# EAGLE board SparkFun_LSM303C_6_DOF_IMU_Breakout_Panel_v10 (EAGLE 7.3.0), part 1 of 3
DESIGNER: Brent Wilkins; VERSION: v10
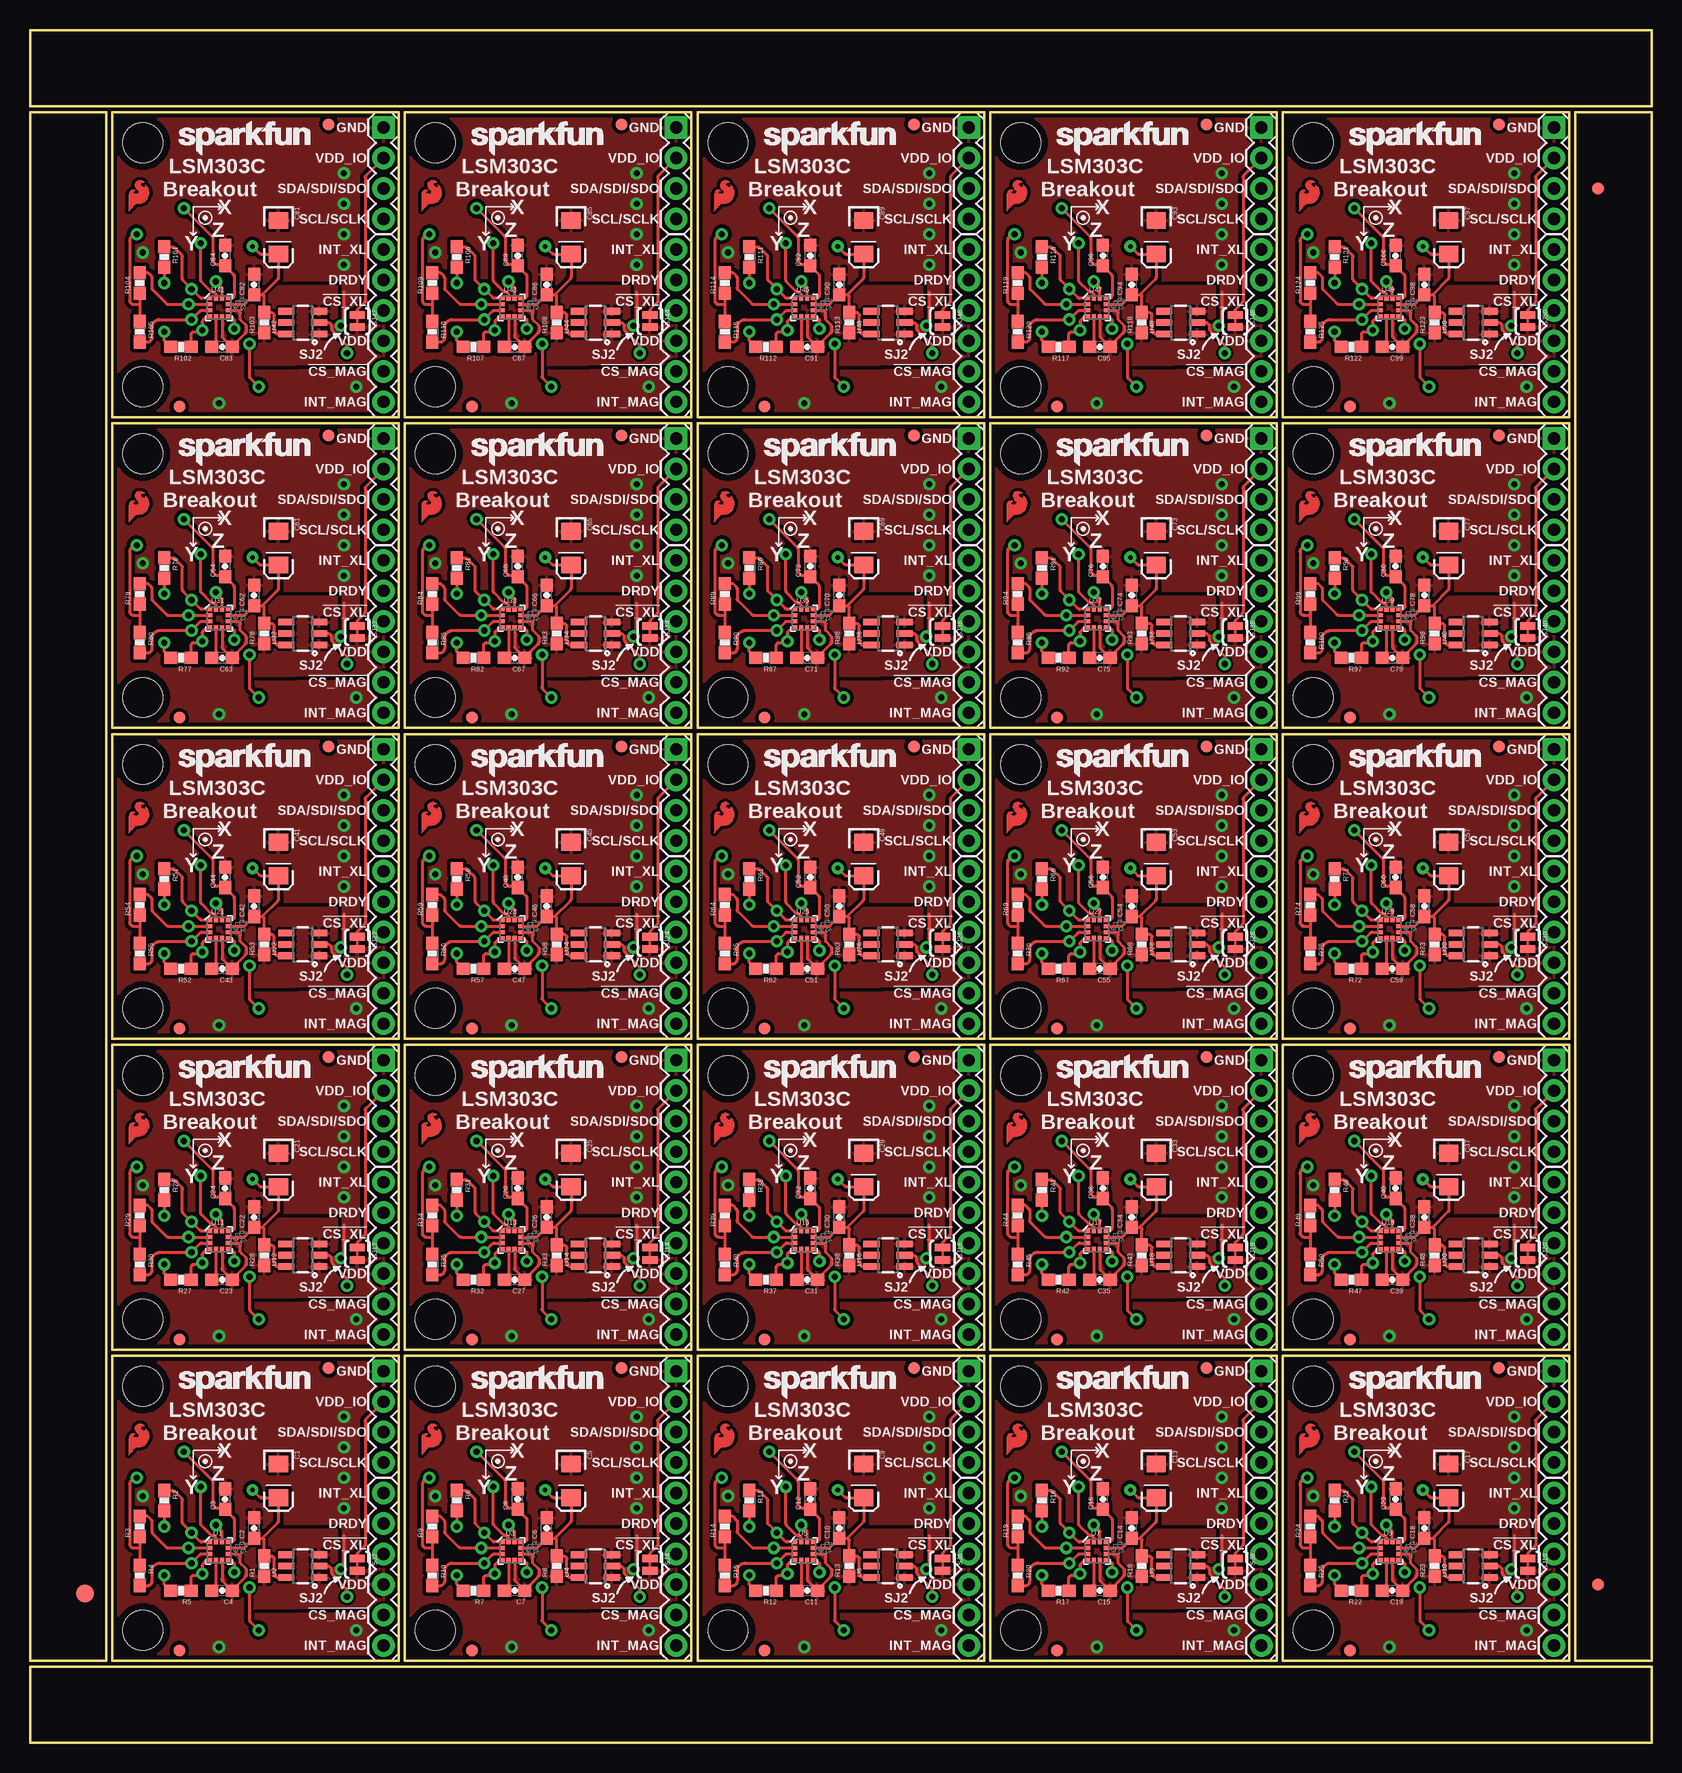
[diagram p0: board, top side]
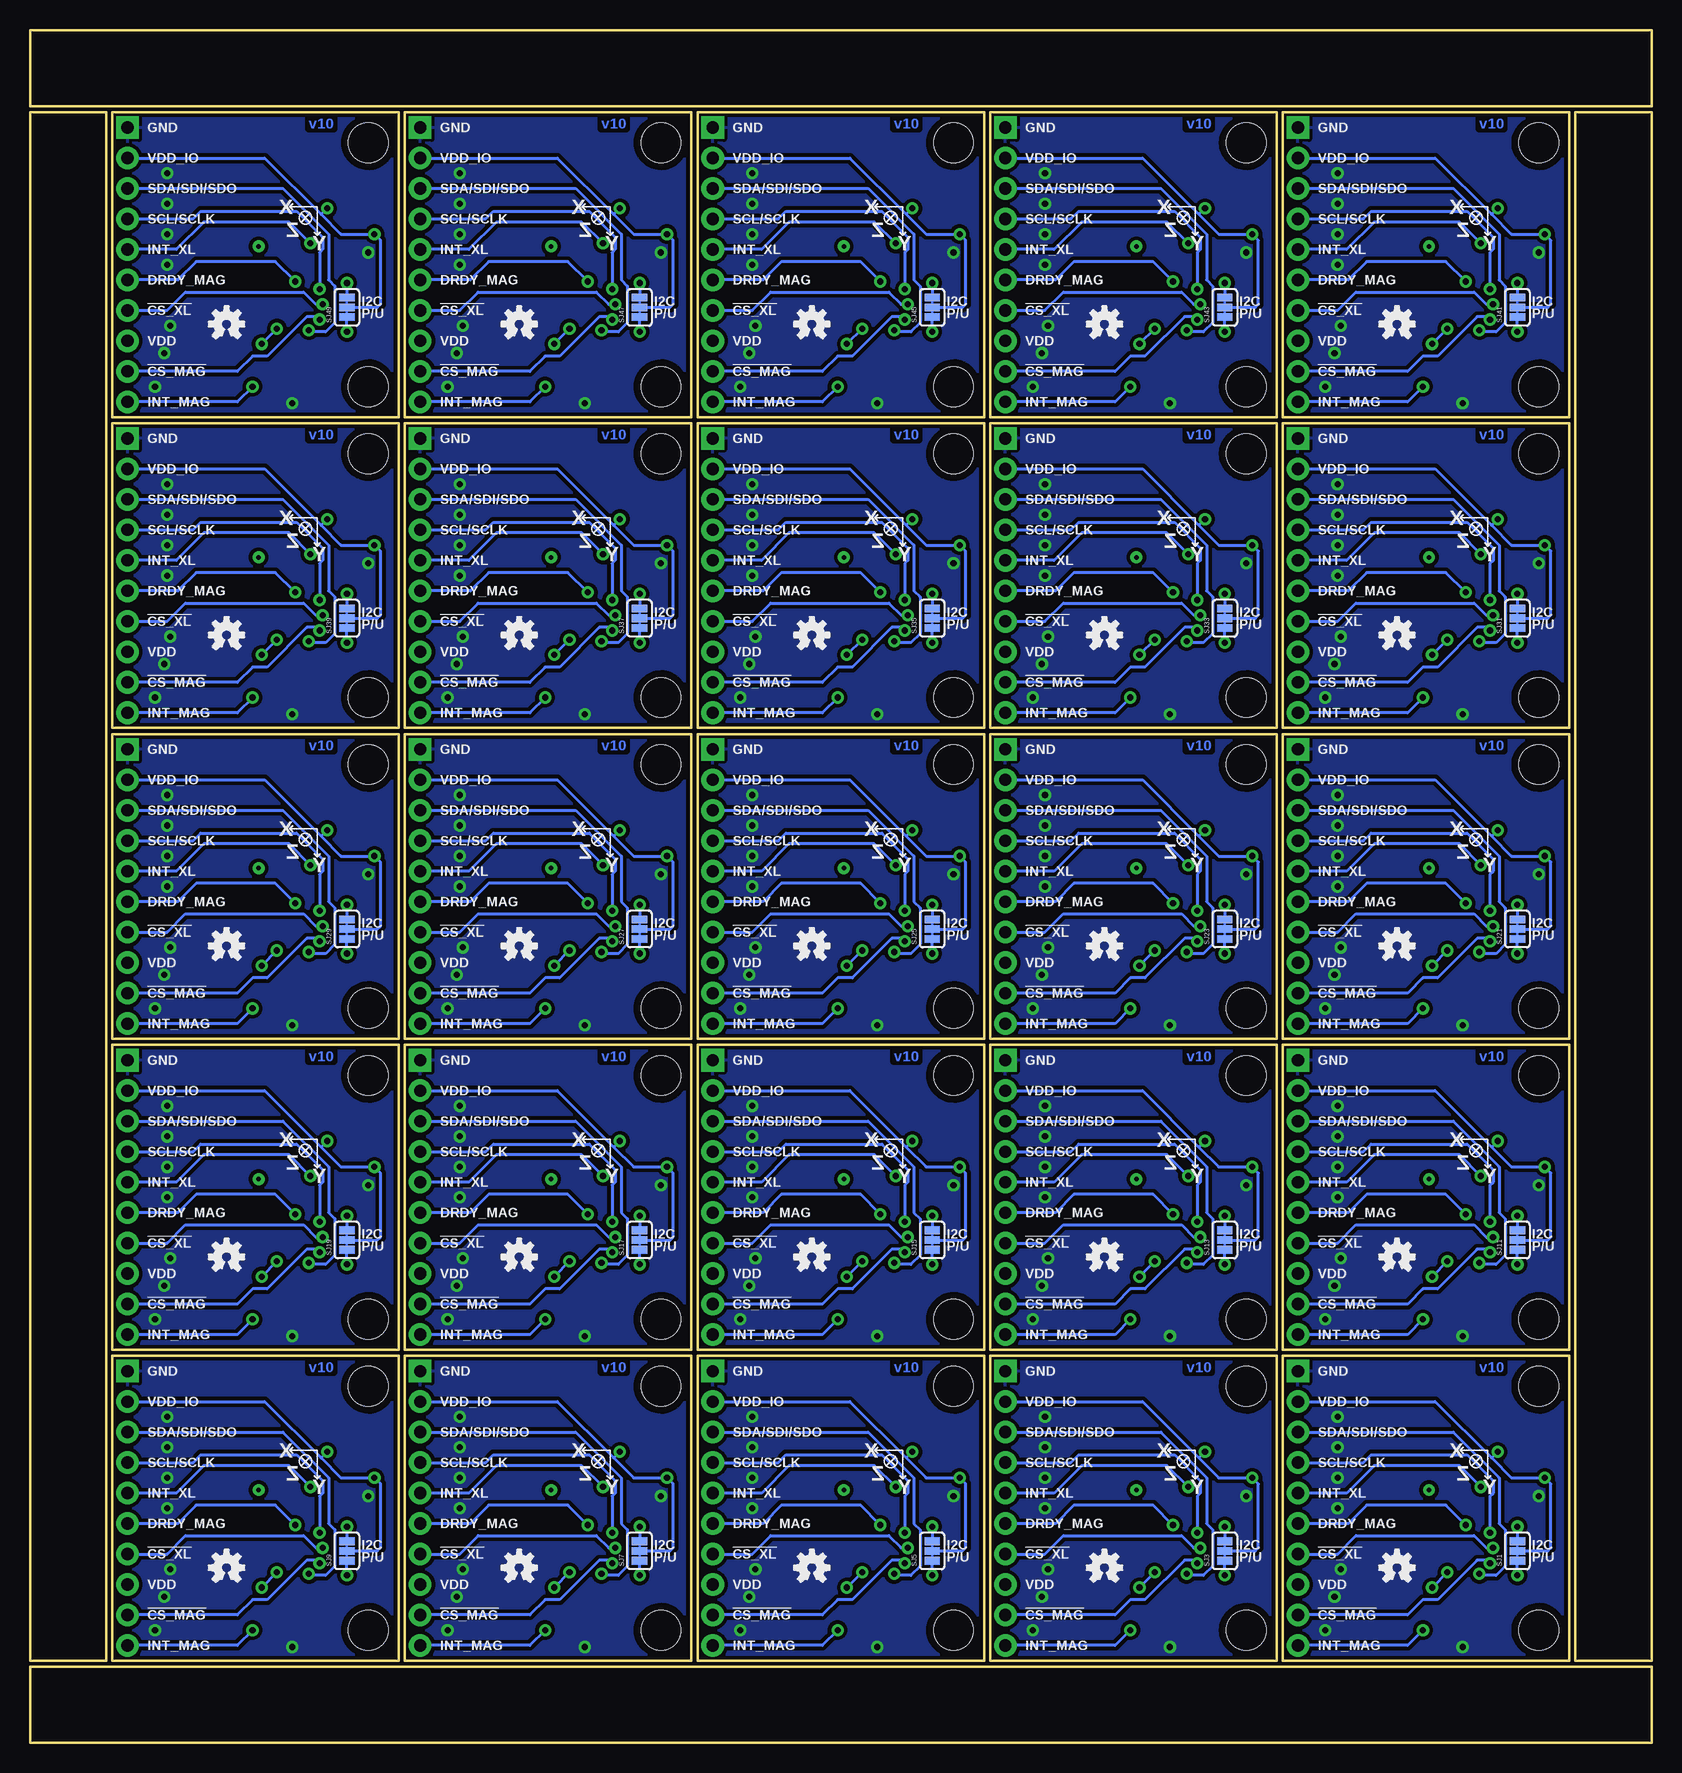
[diagram p1: board, bottom side, seen from below]

Size 135.13 x 142.75 mm. Coordinates in mm from the lower left corner, seen from the top.
Outline: 6.86,6.86 6.86,32.26 30.73,32.26 30.73,6.86 6.86,6.86
Outline: 31.24,6.86 31.24,32.26 55.12,32.26 55.12,6.86 31.24,6.86
Outline: 55.63,6.86 55.63,32.26 79.5,32.26 79.5,6.86 55.63,6.86
Outline: 80.01,6.86 80.01,32.26 103.89,32.26 103.89,6.86 80.01,6.86
Outline: 104.39,6.86 104.39,32.26 128.27,32.26 128.27,6.86 104.39,6.86
Outline: 6.86,32.77 6.86,58.17 30.73,58.17 30.73,32.77 6.86,32.77
Outline: 31.24,32.77 31.24,58.17 55.12,58.17 55.12,32.77 31.24,32.77
Outline: 55.63,32.77 55.63,58.17 79.5,58.17 79.5,32.77 55.63,32.77
Outline: 80.01,32.77 80.01,58.17 103.89,58.17 103.89,32.77 80.01,32.77
Outline: 104.39,32.77 104.39,58.17 128.27,58.17 128.27,32.77 104.39,32.77
Outline: 6.86,58.67 6.86,84.07 30.73,84.07 30.73,58.67 6.86,58.67
Outline: 31.24,58.67 31.24,84.07 55.12,84.07 55.12,58.67 31.24,58.67
Outline: 55.63,58.67 55.63,84.07 79.5,84.07 79.5,58.67 55.63,58.67
Outline: 80.01,58.67 80.01,84.07 103.89,84.07 103.89,58.67 80.01,58.67
Outline: 104.39,58.67 104.39,84.07 128.27,84.07 128.27,58.67 104.39,58.67
Outline: 6.86,84.58 6.86,109.98 30.73,109.98 30.73,84.58 6.86,84.58
Outline: 31.24,84.58 31.24,109.98 55.12,109.98 55.12,84.58 31.24,84.58
Outline: 55.63,84.58 55.63,109.98 79.5,109.98 79.5,84.58 55.63,84.58
Outline: 80.01,84.58 80.01,109.98 103.89,109.98 103.89,84.58 80.01,84.58
Outline: 104.39,84.58 104.39,109.98 128.27,109.98 128.27,84.58 104.39,84.58
Outline: 6.86,110.49 6.86,135.89 30.73,135.89 30.73,110.49 6.86,110.49
Outline: 31.24,110.49 31.24,135.89 55.12,135.89 55.12,110.49 31.24,110.49
Outline: 55.63,110.49 55.63,135.89 79.5,135.89 79.5,110.49 55.63,110.49
Outline: 80.01,110.49 80.01,135.89 103.89,135.89 103.89,110.49 80.01,110.49
Outline: 104.39,110.49 104.39,135.89 128.27,135.89 128.27,110.49 104.39,110.49
Outline: 6.35,6.86 6.35,135.89 0,135.89 0,6.86 6.35,6.86
Outline: 0,0 135.13,0 135.13,6.35 0,6.35 0,0
Outline: 135.13,6.86 135.13,135.89 128.78,135.89 128.78,6.86 135.13,6.86
Outline: 135.13,142.75 0,142.75 0,136.4 135.13,136.4 135.13,142.75
Copper layers (1*16): Top 0.035mm / dielectric 1.5mm / Bottom 0.035mm
Design rules "SparkFun-2-layer": minimum track width 7mil, minimum drill 15mil, track to track 8mil, track to pad 8mil, pad to pad 8mil, via to via 8mil, smd to smd 8mil, copper to edge 8mil, drill to drill 8mil, minimum pad ring 12mil, minimum via ring 10mil, stop-mask expansion 4mil, vias tented up to drill 20mil, thermal gap 10mil

## Footprints (pad centres in the part's own frame; a part is rotated, then mirrored left to right if it is on the bottom)
EIA3216 = smd 1.4 x 1.6: A 1.4,0; C -1.4,0
0603-CAP = smd 1.1 x 1: 1 -0.85,0; 2 0.85,0
FIDUCIAL-1.5X3 = smd 1.5 x 1.5: 1 0,0
FIDUCIAL-1X2 = smd 1 x 1: 1 0,0
1X04 = drill 1.016 pad 1.88 square: 1 0,0 | drill 1.016 pad 1.88: 2 2.54,0; 3 5.08,0; 4 7.62,0
1X06 = drill 1.016 pad 1.88: 1 0,0; 2 2.54,0; 3 5.08,0; 4 7.62,0; 5 10.16,0; 6 12.7,0
0603-RES = smd 1.1 x 1: 1 -0.85,0; 2 0.85,0
PAD-JUMPER-3-3OF3_NC_BY_TRACE_YES_SILK_FULL_BOX = smd 0.635 x 1.27: 1 -0.813,0; 2 0,0; 3 0.813,0
PAD-JUMPER-2-NC_BY_TRACE_YES_SILK = smd 0.635 x 1.27: 1 -0.508,0; 2 0.508,0
STAND-OFF = hole 3.302: 0,0
TP_15TH = drill 0.381 pad 0.61: P$1 0,0
LGA-12 = smd 0.375 x 0.35: 1 -0.75,0.75; 2 -0.75,0.25; 3 -0.75,-0.25; 4 -0.75,-0.75; 7 0.75,-0.75; 8 0.75,-0.25; 9 0.75,0.25; 10 0.75,0.75 | smd 0.35 x 0.375: 5 -0.25,-0.75; 6 0.25,-0.75; 11 0.25,0.75; 12 -0.25,0.75
SOT23-6 = smd 0.55 x 1.35: 1 -0.95,-1.375; 2 0,-1.375; 3 0.95,-1.375; 4 0.95,1.375; 5 0,1.375; 6 -0.95,1.375

## Placement (x,y rotation side)
C1  10uF  [EIA3216]  20.7,21.84 270 top
C2  0.1uF  [0603-CAP]  18.67,17.91 90 top
C3  0.1uF  [0603-CAP]  16.26,20.32 90 top
C4  0.1uF  [0603-CAP]  16,12.7 180 top
C5  10uF  [EIA3216]  45.09,21.84 270 top
C6  0.1uF  [0603-CAP]  43.05,17.91 90 top
C7  0.1uF  [0603-CAP]  40.39,12.7 180 top
C8  0.1uF  [0603-CAP]  40.64,20.32 90 top
C9  10uF  [EIA3216]  69.47,21.84 270 top
C10  0.1uF  [0603-CAP]  67.44,17.91 90 top
C11  0.1uF  [0603-CAP]  64.77,12.7 180 top
C12  0.1uF  [0603-CAP]  65.02,20.32 90 top
C13  10uF  [EIA3216]  93.85,21.84 270 top
C14  0.1uF  [0603-CAP]  91.82,17.91 90 top
C15  0.1uF  [0603-CAP]  89.15,12.7 180 top
C16  0.1uF  [0603-CAP]  89.41,20.32 90 top
C17  10uF  [EIA3216]  118.24,21.84 270 top
C18  0.1uF  [0603-CAP]  116.2,17.91 90 top
C19  0.1uF  [0603-CAP]  113.54,12.7 180 top
C20  0.1uF  [0603-CAP]  113.79,20.32 90 top
C21  10uF  [EIA3216]  20.7,47.75 270 top
C22  0.1uF  [0603-CAP]  18.67,43.81 90 top
C23  0.1uF  [0603-CAP]  16,38.61 180 top
C24  0.1uF  [0603-CAP]  16.26,46.23 90 top
C25  10uF  [EIA3216]  45.09,47.75 270 top
C26  0.1uF  [0603-CAP]  43.05,43.81 90 top
C27  0.1uF  [0603-CAP]  40.39,38.61 180 top
C28  0.1uF  [0603-CAP]  40.64,46.23 90 top
C29  10uF  [EIA3216]  69.47,47.75 270 top
C30  0.1uF  [0603-CAP]  67.44,43.81 90 top
C31  0.1uF  [0603-CAP]  64.77,38.61 180 top
C32  0.1uF  [0603-CAP]  65.02,46.23 90 top
C33  10uF  [EIA3216]  93.85,47.75 270 top
C34  0.1uF  [0603-CAP]  91.82,43.81 90 top
C35  0.1uF  [0603-CAP]  89.15,38.61 180 top
C36  0.1uF  [0603-CAP]  89.41,46.23 90 top
C37  10uF  [EIA3216]  118.24,47.75 270 top
C38  0.1uF  [0603-CAP]  116.2,43.81 90 top
C39  0.1uF  [0603-CAP]  113.54,38.61 180 top
C40  0.1uF  [0603-CAP]  113.79,46.23 90 top
C41  10uF  [EIA3216]  20.7,73.66 270 top
C42  0.1uF  [0603-CAP]  18.67,69.72 90 top
C43  0.1uF  [0603-CAP]  16,64.52 180 top
C44  0.1uF  [0603-CAP]  16.26,72.14 90 top
C45  10uF  [EIA3216]  45.09,73.66 270 top
C46  0.1uF  [0603-CAP]  43.05,69.72 90 top
C47  0.1uF  [0603-CAP]  40.39,64.52 180 top
C48  0.1uF  [0603-CAP]  40.64,72.14 90 top
C49  10uF  [EIA3216]  69.47,73.66 270 top
C50  0.1uF  [0603-CAP]  67.44,69.72 90 top
C51  0.1uF  [0603-CAP]  64.77,64.52 180 top
C52  0.1uF  [0603-CAP]  65.02,72.14 90 top
C53  10uF  [EIA3216]  93.85,73.66 270 top
C54  0.1uF  [0603-CAP]  91.82,69.72 90 top
C55  0.1uF  [0603-CAP]  89.15,64.52 180 top
C56  0.1uF  [0603-CAP]  89.41,72.14 90 top
C57  10uF  [EIA3216]  118.24,73.66 270 top
C58  0.1uF  [0603-CAP]  116.2,69.72 90 top
C59  0.1uF  [0603-CAP]  113.54,64.52 180 top
C60  0.1uF  [0603-CAP]  113.79,72.14 90 top
C61  10uF  [EIA3216]  20.7,99.57 270 top
C62  0.1uF  [0603-CAP]  18.67,95.63 90 top
C63  0.1uF  [0603-CAP]  16,90.42 180 top
C64  0.1uF  [0603-CAP]  16.26,98.04 90 top
C65  10uF  [EIA3216]  45.09,99.57 270 top
C66  0.1uF  [0603-CAP]  43.05,95.63 90 top
C67  0.1uF  [0603-CAP]  40.39,90.42 180 top
C68  0.1uF  [0603-CAP]  40.64,98.04 90 top
C69  10uF  [EIA3216]  69.47,99.57 270 top
C70  0.1uF  [0603-CAP]  67.44,95.63 90 top
C71  0.1uF  [0603-CAP]  64.77,90.42 180 top
C72  0.1uF  [0603-CAP]  65.02,98.04 90 top
C73  10uF  [EIA3216]  93.85,99.57 270 top
C74  0.1uF  [0603-CAP]  91.82,95.63 90 top
C75  0.1uF  [0603-CAP]  89.15,90.42 180 top
C76  0.1uF  [0603-CAP]  89.41,98.04 90 top
C77  10uF  [EIA3216]  118.24,99.57 270 top
C78  0.1uF  [0603-CAP]  116.2,95.63 90 top
C79  0.1uF  [0603-CAP]  113.54,90.42 180 top
C80  0.1uF  [0603-CAP]  113.79,98.04 90 top
C81  10uF  [EIA3216]  20.7,125.48 270 top
C82  0.1uF  [0603-CAP]  18.67,121.54 90 top
C83  0.1uF  [0603-CAP]  16,116.33 180 top
C84  0.1uF  [0603-CAP]  16.26,123.95 90 top
C85  10uF  [EIA3216]  45.09,125.48 270 top
C86  0.1uF  [0603-CAP]  43.05,121.54 90 top
C87  0.1uF  [0603-CAP]  40.39,116.33 180 top
C88  0.1uF  [0603-CAP]  40.64,123.95 90 top
C89  10uF  [EIA3216]  69.47,125.48 270 top
C90  0.1uF  [0603-CAP]  67.44,121.54 90 top
C91  0.1uF  [0603-CAP]  64.77,116.33 180 top
C92  0.1uF  [0603-CAP]  65.02,123.95 90 top
C93  10uF  [EIA3216]  93.85,125.48 270 top
C94  0.1uF  [0603-CAP]  91.82,121.54 90 top
C95  0.1uF  [0603-CAP]  89.15,116.33 180 top
C96  0.1uF  [0603-CAP]  89.41,123.95 90 top
C97  10uF  [EIA3216]  118.24,125.48 270 top
C98  0.1uF  [0603-CAP]  116.2,121.54 90 top
C99  0.1uF  [0603-CAP]  113.54,116.33 180 top
C100  0.1uF  [0603-CAP]  113.79,123.95 90 top
E$1  [FIDUCIAL-1.5X3]  4.57,12.45 0 top
E$4  [FIDUCIAL-1X2]  130.68,13.21 0 top
E$5  [FIDUCIAL-1X2]  130.68,129.54 180 top
FID1  FIDUCIAL1X2  [FIDUCIAL-1X2]  24.89,31.24 0 top
FID2  FIDUCIAL1X2  [FIDUCIAL-1X2]  12.45,7.72 0 top
FID3  FIDUCIAL1X2  [FIDUCIAL-1X2]  36.83,7.72 0 top
FID4  FIDUCIAL1X2  [FIDUCIAL-1X2]  49.28,31.24 0 top
FID5  FIDUCIAL1X2  [FIDUCIAL-1X2]  61.21,7.72 0 top
FID6  FIDUCIAL1X2  [FIDUCIAL-1X2]  73.66,31.24 0 top
FID7  FIDUCIAL1X2  [FIDUCIAL-1X2]  85.6,7.72 0 top
FID8  FIDUCIAL1X2  [FIDUCIAL-1X2]  98.04,31.24 0 top
FID9  FIDUCIAL1X2  [FIDUCIAL-1X2]  109.98,7.72 0 top
FID10  FIDUCIAL1X2  [FIDUCIAL-1X2]  122.43,31.24 0 top
FID11  FIDUCIAL1X2  [FIDUCIAL-1X2]  12.45,33.63 0 top
FID12  FIDUCIAL1X2  [FIDUCIAL-1X2]  24.89,57.15 0 top
FID13  FIDUCIAL1X2  [FIDUCIAL-1X2]  36.83,33.63 0 top
FID14  FIDUCIAL1X2  [FIDUCIAL-1X2]  49.28,57.15 0 top
FID15  FIDUCIAL1X2  [FIDUCIAL-1X2]  61.21,33.63 0 top
FID16  FIDUCIAL1X2  [FIDUCIAL-1X2]  73.66,57.15 0 top
FID17  FIDUCIAL1X2  [FIDUCIAL-1X2]  85.6,33.63 0 top
FID18  FIDUCIAL1X2  [FIDUCIAL-1X2]  98.04,57.15 0 top
FID19  FIDUCIAL1X2  [FIDUCIAL-1X2]  109.98,33.63 0 top
FID20  FIDUCIAL1X2  [FIDUCIAL-1X2]  122.43,57.15 0 top
FID21  FIDUCIAL1X2  [FIDUCIAL-1X2]  12.45,59.54 0 top
FID22  FIDUCIAL1X2  [FIDUCIAL-1X2]  24.89,83.06 0 top
FID23  FIDUCIAL1X2  [FIDUCIAL-1X2]  36.83,59.54 0 top
FID24  FIDUCIAL1X2  [FIDUCIAL-1X2]  49.28,83.06 0 top
FID25  FIDUCIAL1X2  [FIDUCIAL-1X2]  61.21,59.54 0 top
FID26  FIDUCIAL1X2  [FIDUCIAL-1X2]  73.66,83.06 0 top
FID27  FIDUCIAL1X2  [FIDUCIAL-1X2]  85.6,59.54 0 top
FID28  FIDUCIAL1X2  [FIDUCIAL-1X2]  98.04,83.06 0 top
FID29  FIDUCIAL1X2  [FIDUCIAL-1X2]  109.98,59.54 0 top
FID30  FIDUCIAL1X2  [FIDUCIAL-1X2]  122.43,83.06 0 top
FID31  FIDUCIAL1X2  [FIDUCIAL-1X2]  12.45,85.45 0 top
FID32  FIDUCIAL1X2  [FIDUCIAL-1X2]  24.89,108.97 0 top
FID33  FIDUCIAL1X2  [FIDUCIAL-1X2]  36.83,85.45 0 top
FID34  FIDUCIAL1X2  [FIDUCIAL-1X2]  49.28,108.97 0 top
FID35  FIDUCIAL1X2  [FIDUCIAL-1X2]  61.21,85.45 0 top
FID36  FIDUCIAL1X2  [FIDUCIAL-1X2]  73.66,108.97 0 top
FID37  FIDUCIAL1X2  [FIDUCIAL-1X2]  85.6,85.45 0 top
FID38  FIDUCIAL1X2  [FIDUCIAL-1X2]  98.04,108.97 0 top
FID39  FIDUCIAL1X2  [FIDUCIAL-1X2]  109.98,85.45 0 top
FID40  FIDUCIAL1X2  [FIDUCIAL-1X2]  122.43,108.97 0 top
FID41  FIDUCIAL1X2  [FIDUCIAL-1X2]  12.45,111.35 0 top
FID42  FIDUCIAL1X2  [FIDUCIAL-1X2]  24.89,134.87 0 top
FID43  FIDUCIAL1X2  [FIDUCIAL-1X2]  36.83,111.35 0 top
FID44  FIDUCIAL1X2  [FIDUCIAL-1X2]  49.28,134.87 0 top
FID45  FIDUCIAL1X2  [FIDUCIAL-1X2]  61.21,111.35 0 top
FID46  FIDUCIAL1X2  [FIDUCIAL-1X2]  73.66,134.87 0 top
FID47  FIDUCIAL1X2  [FIDUCIAL-1X2]  85.6,111.35 0 top
FID48  FIDUCIAL1X2  [FIDUCIAL-1X2]  98.04,134.87 0 top
FID49  FIDUCIAL1X2  [FIDUCIAL-1X2]  109.98,111.35 0 top
FID50  FIDUCIAL1X2  [FIDUCIAL-1X2]  122.43,134.87 0 top
JP1  [1X04]  29.46,30.99 270 top
JP2  [1X06]  29.46,20.83 270 top
JP3  [1X06]  53.85,20.83 270 top
JP4  [1X04]  53.85,30.99 270 top
JP5  [1X06]  78.23,20.83 270 top
JP6  [1X04]  78.23,30.99 270 top
JP7  [1X06]  102.62,20.83 270 top
JP8  [1X04]  102.62,30.99 270 top
JP9  [1X06]  127,20.83 270 top
JP10  [1X04]  127,30.99 270 top
JP11  [1X06]  29.46,46.74 270 top
JP12  [1X04]  29.46,56.9 270 top
JP13  [1X06]  53.85,46.74 270 top
JP14  [1X04]  53.85,56.9 270 top
JP15  [1X06]  78.23,46.74 270 top
JP16  [1X04]  78.23,56.9 270 top
JP17  [1X06]  102.62,46.74 270 top
JP18  [1X04]  102.62,56.9 270 top
JP19  [1X06]  127,46.74 270 top
JP20  [1X04]  127,56.9 270 top
JP21  [1X06]  29.46,72.64 270 top
JP22  [1X04]  29.46,82.8 270 top
JP23  [1X06]  53.85,72.64 270 top
JP24  [1X04]  53.85,82.8 270 top
JP25  [1X06]  78.23,72.64 270 top
JP26  [1X04]  78.23,82.8 270 top
JP27  [1X06]  102.62,72.64 270 top
JP28  [1X04]  102.62,82.8 270 top
JP29  [1X06]  127,72.64 270 top
JP30  [1X04]  127,82.8 270 top
JP31  [1X06]  29.46,98.55 270 top
JP32  [1X04]  29.46,108.71 270 top
JP33  [1X06]  53.85,98.55 270 top
JP34  [1X04]  53.85,108.71 270 top
JP35  [1X06]  78.23,98.55 270 top
JP36  [1X04]  78.23,108.71 270 top
JP37  [1X06]  102.62,98.55 270 top
JP38  [1X04]  102.62,108.71 270 top
JP39  [1X06]  127,98.55 270 top
JP40  [1X04]  127,108.71 270 top
JP41  [1X06]  29.46,124.46 270 top
JP42  [1X04]  29.46,134.62 270 top
JP43  [1X06]  53.85,124.46 270 top
JP44  [1X04]  53.85,134.62 270 top
JP45  [1X06]  78.23,124.46 270 top
JP46  [1X04]  78.23,134.62 270 top
JP47  [1X06]  102.62,124.46 270 top
JP48  [1X04]  102.62,134.62 270 top
JP49  [1X06]  127,124.46 270 top
JP50  [1X04]  127,134.62 270 top
LOGO1  SFE_LOGO_NAME.1_INCH  [SFE_LOGO_NAME_.1]  11.94,28.19 0 top
LOGO2  SFE_LOGO_FLAME.1EXP  [SFE_LOGO_FLAME_COPPER_EXPOSED_.1]  7.92,23.67 0 top
LOGO3  SFE_LOGO_NAME.1_INCH  [SFE_LOGO_NAME_.1]  36.32,28.19 0 top
LOGO4  SFE_LOGO_FLAME.1EXP  [SFE_LOGO_FLAME_COPPER_EXPOSED_.1]  32.31,23.67 0 top
LOGO5  SFE_LOGO_NAME.1_INCH  [SFE_LOGO_NAME_.1]  60.71,28.19 0 top
LOGO6  SFE_LOGO_FLAME.1EXP  [SFE_LOGO_FLAME_COPPER_EXPOSED_.1]  56.69,23.67 0 top
LOGO7  SFE_LOGO_NAME.1_INCH  [SFE_LOGO_NAME_.1]  85.09,28.19 0 top
LOGO8  SFE_LOGO_FLAME.1EXP  [SFE_LOGO_FLAME_COPPER_EXPOSED_.1]  81.08,23.67 0 top
LOGO9  SFE_LOGO_NAME.1_INCH  [SFE_LOGO_NAME_.1]  109.47,28.19 0 top
LOGO10  SFE_LOGO_FLAME.1EXP  [SFE_LOGO_FLAME_COPPER_EXPOSED_.1]  105.46,23.67 0 top
LOGO11  SFE_LOGO_NAME.1_INCH  [SFE_LOGO_NAME_.1]  11.94,54.1 0 top
LOGO12  SFE_LOGO_FLAME.1EXP  [SFE_LOGO_FLAME_COPPER_EXPOSED_.1]  7.92,49.58 0 top
LOGO13  SFE_LOGO_NAME.1_INCH  [SFE_LOGO_NAME_.1]  36.32,54.1 0 top
LOGO14  SFE_LOGO_FLAME.1EXP  [SFE_LOGO_FLAME_COPPER_EXPOSED_.1]  32.31,49.58 0 top
LOGO15  SFE_LOGO_NAME.1_INCH  [SFE_LOGO_NAME_.1]  60.71,54.1 0 top
LOGO16  SFE_LOGO_FLAME.1EXP  [SFE_LOGO_FLAME_COPPER_EXPOSED_.1]  56.69,49.58 0 top
LOGO17  SFE_LOGO_NAME.1_INCH  [SFE_LOGO_NAME_.1]  85.09,54.1 0 top
LOGO18  SFE_LOGO_FLAME.1EXP  [SFE_LOGO_FLAME_COPPER_EXPOSED_.1]  81.08,49.58 0 top
LOGO19  SFE_LOGO_NAME.1_INCH  [SFE_LOGO_NAME_.1]  109.47,54.1 0 top
LOGO20  SFE_LOGO_FLAME.1EXP  [SFE_LOGO_FLAME_COPPER_EXPOSED_.1]  105.46,49.58 0 top
LOGO21  SFE_LOGO_NAME.1_INCH  [SFE_LOGO_NAME_.1]  11.94,80.01 0 top
LOGO22  SFE_LOGO_FLAME.1EXP  [SFE_LOGO_FLAME_COPPER_EXPOSED_.1]  7.92,75.49 0 top
LOGO23  SFE_LOGO_NAME.1_INCH  [SFE_LOGO_NAME_.1]  36.32,80.01 0 top
LOGO24  SFE_LOGO_FLAME.1EXP  [SFE_LOGO_FLAME_COPPER_EXPOSED_.1]  32.31,75.49 0 top
LOGO25  SFE_LOGO_NAME.1_INCH  [SFE_LOGO_NAME_.1]  60.71,80.01 0 top
LOGO26  SFE_LOGO_FLAME.1EXP  [SFE_LOGO_FLAME_COPPER_EXPOSED_.1]  56.69,75.49 0 top
LOGO27  SFE_LOGO_NAME.1_INCH  [SFE_LOGO_NAME_.1]  85.09,80.01 0 top
LOGO28  SFE_LOGO_FLAME.1EXP  [SFE_LOGO_FLAME_COPPER_EXPOSED_.1]  81.08,75.49 0 top
LOGO29  SFE_LOGO_NAME.1_INCH  [SFE_LOGO_NAME_.1]  109.47,80.01 0 top
LOGO30  SFE_LOGO_FLAME.1EXP  [SFE_LOGO_FLAME_COPPER_EXPOSED_.1]  105.46,75.49 0 top
LOGO31  SFE_LOGO_NAME.1_INCH  [SFE_LOGO_NAME_.1]  11.94,105.92 0 top
LOGO32  SFE_LOGO_FLAME.1EXP  [SFE_LOGO_FLAME_COPPER_EXPOSED_.1]  7.92,101.4 0 top
LOGO33  SFE_LOGO_NAME.1_INCH  [SFE_LOGO_NAME_.1]  36.32,105.92 0 top
LOGO34  SFE_LOGO_FLAME.1EXP  [SFE_LOGO_FLAME_COPPER_EXPOSED_.1]  32.31,101.4 0 top
LOGO35  SFE_LOGO_NAME.1_INCH  [SFE_LOGO_NAME_.1]  60.71,105.92 0 top
LOGO36  SFE_LOGO_FLAME.1EXP  [SFE_LOGO_FLAME_COPPER_EXPOSED_.1]  56.69,101.4 0 top
LOGO37  SFE_LOGO_NAME.1_INCH  [SFE_LOGO_NAME_.1]  85.09,105.92 0 top
LOGO38  SFE_LOGO_FLAME.1EXP  [SFE_LOGO_FLAME_COPPER_EXPOSED_.1]  81.08,101.4 0 top
LOGO39  SFE_LOGO_NAME.1_INCH  [SFE_LOGO_NAME_.1]  109.47,105.92 0 top
LOGO40  SFE_LOGO_FLAME.1EXP  [SFE_LOGO_FLAME_COPPER_EXPOSED_.1]  105.46,101.4 0 top
LOGO41  SFE_LOGO_NAME.1_INCH  [SFE_LOGO_NAME_.1]  11.94,131.83 0 top
LOGO42  SFE_LOGO_FLAME.1EXP  [SFE_LOGO_FLAME_COPPER_EXPOSED_.1]  7.92,127.3 0 top
LOGO43  SFE_LOGO_NAME.1_INCH  [SFE_LOGO_NAME_.1]  36.32,131.83 0 top
LOGO44  SFE_LOGO_FLAME.1EXP  [SFE_LOGO_FLAME_COPPER_EXPOSED_.1]  32.31,127.3 0 top
LOGO45  SFE_LOGO_NAME.1_INCH  [SFE_LOGO_NAME_.1]  60.71,131.83 0 top
LOGO46  SFE_LOGO_FLAME.1EXP  [SFE_LOGO_FLAME_COPPER_EXPOSED_.1]  56.69,127.3 0 top
LOGO47  SFE_LOGO_NAME.1_INCH  [SFE_LOGO_NAME_.1]  85.09,131.83 0 top
LOGO48  SFE_LOGO_FLAME.1EXP  [SFE_LOGO_FLAME_COPPER_EXPOSED_.1]  81.08,127.3 0 top
LOGO49  SFE_LOGO_NAME.1_INCH  [SFE_LOGO_NAME_.1]  109.47,131.83 0 top
LOGO50  SFE_LOGO_FLAME.1EXP  [SFE_LOGO_FLAME_COPPER_EXPOSED_.1]  105.46,127.3 0 top
R1  68  [0603-RES]  19.51,14.73 90 top
R2  4.7K  [0603-RES]  11.18,20.19 270 top
R3  10K  [0603-RES]  9.14,18.03 90 top
R4  10K  [0603-RES]  9.14,13.97 270 top
R5  4.7K  [0603-RES]  12.57,12.7 180 top
R6  4.7K  [0603-RES]  35.56,20.19 270 top
R7  4.7K  [0603-RES]  36.96,12.7 180 top
R8  68  [0603-RES]  43.89,14.73 90 top
R9  10K  [0603-RES]  33.53,18.03 90 top
R10  10K  [0603-RES]  33.53,13.97 270 top
R11  4.7K  [0603-RES]  59.94,20.19 270 top
R12  4.7K  [0603-RES]  61.34,12.7 180 top
R13  68  [0603-RES]  68.28,14.73 90 top
R14  10K  [0603-RES]  57.91,18.03 90 top
R15  10K  [0603-RES]  57.91,13.97 270 top
R16  4.7K  [0603-RES]  84.33,20.19 270 top
R17  4.7K  [0603-RES]  85.72,12.7 180 top
R18  68  [0603-RES]  92.66,14.73 90 top
R19  10K  [0603-RES]  82.3,18.03 90 top
R20  10K  [0603-RES]  82.3,13.97 270 top
R21  4.7K  [0603-RES]  108.71,20.19 270 top
R22  4.7K  [0603-RES]  110.11,12.7 180 top
R23  68  [0603-RES]  117.04,14.73 90 top
R24  10K  [0603-RES]  106.68,18.03 90 top
R25  10K  [0603-RES]  106.68,13.97 270 top
R26  4.7K  [0603-RES]  11.18,46.1 270 top
R27  4.7K  [0603-RES]  12.57,38.61 180 top
R28  68  [0603-RES]  19.51,40.64 90 top
R29  10K  [0603-RES]  9.14,43.94 90 top
R30  10K  [0603-RES]  9.14,39.88 270 top
R31  4.7K  [0603-RES]  35.56,46.1 270 top
R32  4.7K  [0603-RES]  36.96,38.61 180 top
R33  68  [0603-RES]  43.89,40.64 90 top
R34  10K  [0603-RES]  33.53,43.94 90 top
R35  10K  [0603-RES]  33.53,39.88 270 top
R36  4.7K  [0603-RES]  59.94,46.1 270 top
R37  4.7K  [0603-RES]  61.34,38.61 180 top
R38  68  [0603-RES]  68.28,40.64 90 top
R39  10K  [0603-RES]  57.91,43.94 90 top
R40  10K  [0603-RES]  57.91,39.88 270 top
R41  4.7K  [0603-RES]  84.33,46.1 270 top
R42  4.7K  [0603-RES]  85.72,38.61 180 top
R43  68  [0603-RES]  92.66,40.64 90 top
R44  10K  [0603-RES]  82.3,43.94 90 top
R45  10K  [0603-RES]  82.3,39.88 270 top
R46  4.7K  [0603-RES]  108.71,46.1 270 top
R47  4.7K  [0603-RES]  110.11,38.61 180 top
R48  68  [0603-RES]  117.04,40.64 90 top
R49  10K  [0603-RES]  106.68,43.94 90 top
R50  10K  [0603-RES]  106.68,39.88 270 top
R51  4.7K  [0603-RES]  11.18,72.01 270 top
R52  4.7K  [0603-RES]  12.57,64.52 180 top
R53  68  [0603-RES]  19.51,66.55 90 top
R54  10K  [0603-RES]  9.14,69.85 90 top
R55  10K  [0603-RES]  9.14,65.79 270 top
R56  4.7K  [0603-RES]  35.56,72.01 270 top
R57  4.7K  [0603-RES]  36.96,64.52 180 top
R58  68  [0603-RES]  43.89,66.55 90 top
R59  10K  [0603-RES]  33.53,69.85 90 top
R60  10K  [0603-RES]  33.53,65.79 270 top
R61  4.7K  [0603-RES]  59.94,72.01 270 top
R62  4.7K  [0603-RES]  61.34,64.52 180 top
R63  68  [0603-RES]  68.28,66.55 90 top
R64  10K  [0603-RES]  57.91,69.85 90 top
R65  10K  [0603-RES]  57.91,65.79 270 top
R66  4.7K  [0603-RES]  84.33,72.01 270 top
R67  4.7K  [0603-RES]  85.72,64.52 180 top
R68  68  [0603-RES]  92.66,66.55 90 top
R69  10K  [0603-RES]  82.3,69.85 90 top
R70  10K  [0603-RES]  82.3,65.79 270 top
R71  4.7K  [0603-RES]  108.71,72.01 270 top
R72  4.7K  [0603-RES]  110.11,64.52 180 top
R73  68  [0603-RES]  117.04,66.55 90 top
R74  10K  [0603-RES]  106.68,69.85 90 top
R75  10K  [0603-RES]  106.68,65.79 270 top
R76  4.7K  [0603-RES]  11.18,97.92 270 top
R77  4.7K  [0603-RES]  12.57,90.42 180 top
R78  68  [0603-RES]  19.51,92.46 90 top
R79  10K  [0603-RES]  9.14,95.76 90 top
R80  10K  [0603-RES]  9.14,91.69 270 top
R81  4.7K  [0603-RES]  35.56,97.92 270 top
R82  4.7K  [0603-RES]  36.96,90.42 180 top
R83  68  [0603-RES]  43.89,92.46 90 top
R84  10K  [0603-RES]  33.53,95.76 90 top
R85  10K  [0603-RES]  33.53,91.69 270 top
R86  4.7K  [0603-RES]  59.94,97.92 270 top
R87  4.7K  [0603-RES]  61.34,90.42 180 top
R88  68  [0603-RES]  68.28,92.46 90 top
R89  10K  [0603-RES]  57.91,95.76 90 top
R90  10K  [0603-RES]  57.91,91.69 270 top
R91  4.7K  [0603-RES]  84.33,97.92 270 top
R92  4.7K  [0603-RES]  85.72,90.42 180 top
R93  68  [0603-RES]  92.66,92.46 90 top
R94  10K  [0603-RES]  82.3,95.76 90 top
R95  10K  [0603-RES]  82.3,91.69 270 top
R96  4.7K  [0603-RES]  108.71,97.92 270 top
R97  4.7K  [0603-RES]  110.11,90.42 180 top
R98  68  [0603-RES]  117.04,92.46 90 top
R99  10K  [0603-RES]  106.68,95.76 90 top
R100  10K  [0603-RES]  106.68,91.69 270 top
R101  4.7K  [0603-RES]  11.18,123.83 270 top
R102  4.7K  [0603-RES]  12.57,116.33 180 top
R103  68  [0603-RES]  19.51,118.36 90 top
R104  10K  [0603-RES]  9.14,121.67 90 top
R105  10K  [0603-RES]  9.14,117.6 270 top
R106  4.7K  [0603-RES]  35.56,123.83 270 top
R107  4.7K  [0603-RES]  36.96,116.33 180 top
R108  68  [0603-RES]  43.89,118.36 90 top
R109  10K  [0603-RES]  33.53,121.67 90 top
R110  10K  [0603-RES]  33.53,117.6 270 top
R111  4.7K  [0603-RES]  59.94,123.83 270 top
R112  4.7K  [0603-RES]  61.34,116.33 180 top
R113  68  [0603-RES]  68.28,118.36 90 top
R114  10K  [0603-RES]  57.91,121.67 90 top
R115  10K  [0603-RES]  57.91,117.6 270 top
R116  4.7K  [0603-RES]  84.33,123.83 270 top
R117  4.7K  [0603-RES]  85.72,116.33 180 top
R118  68  [0603-RES]  92.66,118.36 90 top
R119  10K  [0603-RES]  82.3,121.67 90 top
R120  10K  [0603-RES]  82.3,117.6 270 top
R121  4.7K  [0603-RES]  108.71,123.83 270 top
R122  4.7K  [0603-RES]  110.11,116.33 180 top
R123  68  [0603-RES]  117.04,118.36 90 top
R124  10K  [0603-RES]  106.68,121.67 90 top
R125  10K  [0603-RES]  106.68,117.6 270 top
SJ1  [PAD-JUMPER-3-3OF3_NC_BY_TRACE_YES_SILK_FULL_BOX]  11.18,16 90 bottom
SJ2  JUMPER-PAD-2-NC_BY_TRACE  [PAD-JUMPER-2-NC_BY_TRACE_YES_SILK]  27.28,14.86 270 top
SJ3  [PAD-JUMPER-3-3OF3_NC_BY_TRACE_YES_SILK_FULL_BOX]  35.56,16 90 bottom
SJ4  JUMPER-PAD-2-NC_BY_TRACE  [PAD-JUMPER-2-NC_BY_TRACE_YES_SILK]  51.66,14.86 270 top
SJ5  [PAD-JUMPER-3-3OF3_NC_BY_TRACE_YES_SILK_FULL_BOX]  59.94,16 90 bottom
SJ6  JUMPER-PAD-2-NC_BY_TRACE  [PAD-JUMPER-2-NC_BY_TRACE_YES_SILK]  76.05,14.86 270 top
SJ7  [PAD-JUMPER-3-3OF3_NC_BY_TRACE_YES_SILK_FULL_BOX]  84.33,16 90 bottom
SJ8  JUMPER-PAD-2-NC_BY_TRACE  [PAD-JUMPER-2-NC_BY_TRACE_YES_SILK]  100.43,14.86 270 top
SJ9  [PAD-JUMPER-3-3OF3_NC_BY_TRACE_YES_SILK_FULL_BOX]  108.71,16 90 bottom
SJ10  JUMPER-PAD-2-NC_BY_TRACE  [PAD-JUMPER-2-NC_BY_TRACE_YES_SILK]  124.82,14.86 270 top
SJ11  [PAD-JUMPER-3-3OF3_NC_BY_TRACE_YES_SILK_FULL_BOX]  11.18,41.91 90 bottom
SJ12  JUMPER-PAD-2-NC_BY_TRACE  [PAD-JUMPER-2-NC_BY_TRACE_YES_SILK]  27.28,40.77 270 top
SJ13  [PAD-JUMPER-3-3OF3_NC_BY_TRACE_YES_SILK_FULL_BOX]  35.56,41.91 90 bottom
SJ14  JUMPER-PAD-2-NC_BY_TRACE  [PAD-JUMPER-2-NC_BY_TRACE_YES_SILK]  51.66,40.77 270 top
SJ15  [PAD-JUMPER-3-3OF3_NC_BY_TRACE_YES_SILK_FULL_BOX]  59.94,41.91 90 bottom
SJ16  JUMPER-PAD-2-NC_BY_TRACE  [PAD-JUMPER-2-NC_BY_TRACE_YES_SILK]  76.05,40.77 270 top
SJ17  [PAD-JUMPER-3-3OF3_NC_BY_TRACE_YES_SILK_FULL_BOX]  84.33,41.91 90 bottom
SJ18  JUMPER-PAD-2-NC_BY_TRACE  [PAD-JUMPER-2-NC_BY_TRACE_YES_SILK]  100.43,40.77 270 top
SJ19  [PAD-JUMPER-3-3OF3_NC_BY_TRACE_YES_SILK_FULL_BOX]  108.71,41.91 90 bottom
SJ20  JUMPER-PAD-2-NC_BY_TRACE  [PAD-JUMPER-2-NC_BY_TRACE_YES_SILK]  124.82,40.77 270 top
SJ21  [PAD-JUMPER-3-3OF3_NC_BY_TRACE_YES_SILK_FULL_BOX]  11.18,67.82 90 bottom
SJ22  JUMPER-PAD-2-NC_BY_TRACE  [PAD-JUMPER-2-NC_BY_TRACE_YES_SILK]  27.28,66.67 270 top
SJ23  [PAD-JUMPER-3-3OF3_NC_BY_TRACE_YES_SILK_FULL_BOX]  35.56,67.82 90 bottom
SJ24  JUMPER-PAD-2-NC_BY_TRACE  [PAD-JUMPER-2-NC_BY_TRACE_YES_SILK]  51.66,66.67 270 top
SJ25  [PAD-JUMPER-3-3OF3_NC_BY_TRACE_YES_SILK_FULL_BOX]  59.94,67.82 90 bottom
SJ26  JUMPER-PAD-2-NC_BY_TRACE  [PAD-JUMPER-2-NC_BY_TRACE_YES_SILK]  76.05,66.67 270 top
SJ27  [PAD-JUMPER-3-3OF3_NC_BY_TRACE_YES_SILK_FULL_BOX]  84.33,67.82 90 bottom
SJ28  JUMPER-PAD-2-NC_BY_TRACE  [PAD-JUMPER-2-NC_BY_TRACE_YES_SILK]  100.43,66.67 270 top
SJ29  [PAD-JUMPER-3-3OF3_NC_BY_TRACE_YES_SILK_FULL_BOX]  108.71,67.82 90 bottom
SJ30  JUMPER-PAD-2-NC_BY_TRACE  [PAD-JUMPER-2-NC_BY_TRACE_YES_SILK]  124.82,66.67 270 top
SJ31  [PAD-JUMPER-3-3OF3_NC_BY_TRACE_YES_SILK_FULL_BOX]  11.18,93.73 90 bottom
SJ32  JUMPER-PAD-2-NC_BY_TRACE  [PAD-JUMPER-2-NC_BY_TRACE_YES_SILK]  27.28,92.58 270 top
SJ33  [PAD-JUMPER-3-3OF3_NC_BY_TRACE_YES_SILK_FULL_BOX]  35.56,93.73 90 bottom
SJ34  JUMPER-PAD-2-NC_BY_TRACE  [PAD-JUMPER-2-NC_BY_TRACE_YES_SILK]  51.66,92.58 270 top
SJ35  [PAD-JUMPER-3-3OF3_NC_BY_TRACE_YES_SILK_FULL_BOX]  59.94,93.73 90 bottom
SJ36  JUMPER-PAD-2-NC_BY_TRACE  [PAD-JUMPER-2-NC_BY_TRACE_YES_SILK]  76.05,92.58 270 top
SJ37  [PAD-JUMPER-3-3OF3_NC_BY_TRACE_YES_SILK_FULL_BOX]  84.33,93.73 90 bottom
SJ38  JUMPER-PAD-2-NC_BY_TRACE  [PAD-JUMPER-2-NC_BY_TRACE_YES_SILK]  100.43,92.58 270 top
SJ39  [PAD-JUMPER-3-3OF3_NC_BY_TRACE_YES_SILK_FULL_BOX]  108.71,93.73 90 bottom
SJ40  JUMPER-PAD-2-NC_BY_TRACE  [PAD-JUMPER-2-NC_BY_TRACE_YES_SILK]  124.82,92.58 270 top
SJ41  [PAD-JUMPER-3-3OF3_NC_BY_TRACE_YES_SILK_FULL_BOX]  11.18,119.63 90 bottom
SJ42  JUMPER-PAD-2-NC_BY_TRACE  [PAD-JUMPER-2-NC_BY_TRACE_YES_SILK]  27.28,118.49 270 top
SJ43  [PAD-JUMPER-3-3OF3_NC_BY_TRACE_YES_SILK_FULL_BOX]  35.56,119.63 90 bottom
SJ44  JUMPER-PAD-2-NC_BY_TRACE  [PAD-JUMPER-2-NC_BY_TRACE_YES_SILK]  51.66,118.49 270 top
SJ45  [PAD-JUMPER-3-3OF3_NC_BY_TRACE_YES_SILK_FULL_BOX]  59.94,119.63 90 bottom
SJ46  JUMPER-PAD-2-NC_BY_TRACE  [PAD-JUMPER-2-NC_BY_TRACE_YES_SILK]  76.05,118.49 270 top
SJ47  [PAD-JUMPER-3-3OF3_NC_BY_TRACE_YES_SILK_FULL_BOX]  84.33,119.63 90 bottom
SJ48  JUMPER-PAD-2-NC_BY_TRACE  [PAD-JUMPER-2-NC_BY_TRACE_YES_SILK]  100.43,118.49 270 top
SJ49  [PAD-JUMPER-3-3OF3_NC_BY_TRACE_YES_SILK_FULL_BOX]  108.71,119.63 90 bottom
SJ50  JUMPER-PAD-2-NC_BY_TRACE  [PAD-JUMPER-2-NC_BY_TRACE_YES_SILK]  124.82,118.49 270 top
STANDOFF1  STAND-OFF  [STAND-OFF]  9.4,29.72 0 top
STANDOFF2  STAND-OFF  [STAND-OFF]  9.4,9.4 0 top
STANDOFF3  STAND-OFF  [STAND-OFF]  33.78,29.72 0 top
STANDOFF4  STAND-OFF  [STAND-OFF]  33.78,9.4 0 top
STANDOFF5  STAND-OFF  [STAND-OFF]  58.17,29.72 0 top
STANDOFF6  STAND-OFF  [STAND-OFF]  58.17,9.4 0 top
STANDOFF7  STAND-OFF  [STAND-OFF]  82.55,29.72 0 top
STANDOFF8  STAND-OFF  [STAND-OFF]  82.55,9.4 0 top
STANDOFF9  STAND-OFF  [STAND-OFF]  106.93,29.72 0 top
STANDOFF10  STAND-OFF  [STAND-OFF]  106.93,9.4 0 top
STANDOFF11  STAND-OFF  [STAND-OFF]  9.4,55.63 0 top
STANDOFF12  STAND-OFF  [STAND-OFF]  9.4,35.31 0 top
STANDOFF13  STAND-OFF  [STAND-OFF]  33.78,55.63 0 top
STANDOFF14  STAND-OFF  [STAND-OFF]  33.78,35.31 0 top
STANDOFF15  STAND-OFF  [STAND-OFF]  58.17,55.63 0 top
STANDOFF16  STAND-OFF  [STAND-OFF]  58.17,35.31 0 top
STANDOFF17  STAND-OFF  [STAND-OFF]  82.55,55.63 0 top
STANDOFF18  STAND-OFF  [STAND-OFF]  82.55,35.31 0 top
STANDOFF19  STAND-OFF  [STAND-OFF]  106.93,55.63 0 top
STANDOFF20  STAND-OFF  [STAND-OFF]  106.93,35.31 0 top
STANDOFF21  STAND-OFF  [STAND-OFF]  9.4,81.53 0 top
STANDOFF22  STAND-OFF  [STAND-OFF]  9.4,61.21 0 top
STANDOFF23  STAND-OFF  [STAND-OFF]  33.78,81.53 0 top
STANDOFF24  STAND-OFF  [STAND-OFF]  33.78,61.21 0 top
STANDOFF25  STAND-OFF  [STAND-OFF]  58.17,81.53 0 top
STANDOFF26  STAND-OFF  [STAND-OFF]  58.17,61.21 0 top
STANDOFF27  STAND-OFF  [STAND-OFF]  82.55,81.53 0 top
STANDOFF28  STAND-OFF  [STAND-OFF]  82.55,61.21 0 top
STANDOFF29  STAND-OFF  [STAND-OFF]  106.93,81.53 0 top
STANDOFF30  STAND-OFF  [STAND-OFF]  106.93,61.21 0 top
STANDOFF31  STAND-OFF  [STAND-OFF]  9.4,107.44 0 top
STANDOFF32  STAND-OFF  [STAND-OFF]  9.4,87.12 0 top
STANDOFF33  STAND-OFF  [STAND-OFF]  33.78,107.44 0 top
STANDOFF34  STAND-OFF  [STAND-OFF]  33.78,87.12 0 top
STANDOFF35  STAND-OFF  [STAND-OFF]  58.17,107.44 0 top
STANDOFF36  STAND-OFF  [STAND-OFF]  58.17,87.12 0 top
STANDOFF37  STAND-OFF  [STAND-OFF]  82.55,107.44 0 top
STANDOFF38  STAND-OFF  [STAND-OFF]  82.55,87.12 0 top
STANDOFF39  STAND-OFF  [STAND-OFF]  106.93,107.44 0 top
STANDOFF40  STAND-OFF  [STAND-OFF]  106.93,87.12 0 top
STANDOFF41  STAND-OFF  [STAND-OFF]  9.4,133.35 0 top
STANDOFF42  STAND-OFF  [STAND-OFF]  9.4,113.03 0 top
STANDOFF43  STAND-OFF  [STAND-OFF]  33.78,133.35 0 top
STANDOFF44  STAND-OFF  [STAND-OFF]  33.78,113.03 0 top
STANDOFF45  STAND-OFF  [STAND-OFF]  58.17,133.35 0 top
STANDOFF46  STAND-OFF  [STAND-OFF]  58.17,113.03 0 top
STANDOFF47  STAND-OFF  [STAND-OFF]  82.55,133.35 0 top
STANDOFF48  STAND-OFF  [STAND-OFF]  82.55,113.03 0 top
STANDOFF49  STAND-OFF  [STAND-OFF]  106.93,133.35 0 top
STANDOFF50  STAND-OFF  [STAND-OFF]  106.93,113.03 0 top
TP1  VDD_TP  [TP_15TH]  18.54,21.08 0 top
TP2  VDD_TP  [TP_15TH]  42.93,21.08 0 top
TP3  VDD_TP  [TP_15TH]  67.31,21.08 0 top
TP4  VDD_TP  [TP_15TH]  91.69,21.08 0 top
TP5  VDD_TP  [TP_15TH]  116.08,21.08 0 top
TP6  VDD_TP  [TP_15TH]  18.54,46.99 0 top
TP7  VDD_TP  [TP_15TH]  42.93,46.99 0 top
TP8  VDD_TP  [TP_15TH]  67.31,46.99 0 top
TP9  VDD_TP  [TP_15TH]  91.69,46.99 0 top
TP10  VDD_TP  [TP_15TH]  116.08,46.99 0 top
TP11  VDD_TP  [TP_15TH]  18.54,72.9 0 top
TP12  VDD_TP  [TP_15TH]  42.93,72.9 0 top
TP13  VDD_TP  [TP_15TH]  67.31,72.9 0 top
TP14  VDD_TP  [TP_15TH]  91.69,72.9 0 top
TP15  VDD_TP  [TP_15TH]  116.08,72.9 0 top
TP16  VDD_TP  [TP_15TH]  18.54,98.81 0 top
TP17  VDD_TP  [TP_15TH]  42.93,98.81 0 top
TP18  VDD_TP  [TP_15TH]  67.31,98.81 0 top
TP19  VDD_TP  [TP_15TH]  91.69,98.81 0 top
TP20  VDD_TP  [TP_15TH]  116.08,98.81 0 top
TP21  VDD_TP  [TP_15TH]  18.54,124.71 0 top
TP22  VDD_TP  [TP_15TH]  42.93,124.71 0 top
TP23  VDD_TP  [TP_15TH]  67.31,124.71 0 top
TP24  VDD_TP  [TP_15TH]  91.69,124.71 0 top
TP25  VDD_TP  [TP_15TH]  116.08,124.71 0 top
U1  LSM303C  [LGA-12]  15.75,16 0 top
U2  LM3880  [SOT23-6]  22.73,14.73 90 top
U3  LSM303C  [LGA-12]  40.13,16 0 top
U4  LM3880  [SOT23-6]  47.12,14.73 90 top
U5  LSM303C  [LGA-12]  64.52,16 0 top
U6  LM3880  [SOT23-6]  71.5,14.73 90 top
U7  LSM303C  [LGA-12]  88.9,16 0 top
U8  LM3880  [SOT23-6]  95.89,14.73 90 top
U9  LSM303C  [LGA-12]  113.28,16 0 top
U10  LM3880  [SOT23-6]  120.27,14.73 90 top
U11  LSM303C  [LGA-12]  15.75,41.91 0 top
U12  LM3880  [SOT23-6]  22.73,40.64 90 top
U13  LSM303C  [LGA-12]  40.13,41.91 0 top
U14  LM3880  [SOT23-6]  47.12,40.64 90 top
U15  LSM303C  [LGA-12]  64.52,41.91 0 top
U16  LM3880  [SOT23-6]  71.5,40.64 90 top
U17  LSM303C  [LGA-12]  88.9,41.91 0 top
U18  LM3880  [SOT23-6]  95.89,40.64 90 top
U19  LSM303C  [LGA-12]  113.28,41.91 0 top
U20  LM3880  [SOT23-6]  120.27,40.64 90 top
U21  LSM303C  [LGA-12]  15.75,67.82 0 top
U22  LM3880  [SOT23-6]  22.73,66.55 90 top
U23  LSM303C  [LGA-12]  40.13,67.82 0 top
U24  LM3880  [SOT23-6]  47.12,66.55 90 top
U25  LSM303C  [LGA-12]  64.52,67.82 0 top
U26  LM3880  [SOT23-6]  71.5,66.55 90 top
U27  LSM303C  [LGA-12]  88.9,67.82 0 top
U28  LM3880  [SOT23-6]  95.89,66.55 90 top
U29  LSM303C  [LGA-12]  113.28,67.82 0 top
U30  LM3880  [SOT23-6]  120.27,66.55 90 top
U31  LSM303C  [LGA-12]  15.75,93.73 0 top
U32  LM3880  [SOT23-6]  22.73,92.46 90 top
U33  LSM303C  [LGA-12]  40.13,93.73 0 top
U34  LM3880  [SOT23-6]  47.12,92.46 90 top
U35  LSM303C  [LGA-12]  64.52,93.73 0 top
U36  LM3880  [SOT23-6]  71.5,92.46 90 top
U37  LSM303C  [LGA-12]  88.9,93.73 0 top
U38  LM3880  [SOT23-6]  95.89,92.46 90 top
U39  LSM303C  [LGA-12]  113.28,93.73 0 top
U40  LM3880  [SOT23-6]  120.27,92.46 90 top
U41  LSM303C  [LGA-12]  15.75,119.63 0 top
U42  LM3880  [SOT23-6]  22.73,118.36 90 top
U43  LSM303C  [LGA-12]  40.13,119.63 0 top
U44  LM3880  [SOT23-6]  47.12,118.36 90 top
U45  LSM303C  [LGA-12]  64.52,119.63 0 top
U46  LM3880  [SOT23-6]  71.5,118.36 90 top
U47  LSM303C  [LGA-12]  88.9,119.63 0 top
U48  LM3880  [SOT23-6]  95.89,118.36 90 top
U49  LSM303C  [LGA-12]  113.28,119.63 0 top
U50  LM3880  [SOT23-6]  120.27,118.36 90 top
U$1  OSHW-LOGOS  [OSHW-LOGO-S]  45.59,14.61 0 bottom
U$2  OSHW-LOGOS  [OSHW-LOGO-S]  69.98,14.61 0 bottom
U$3  OSHW-LOGOS  [OSHW-LOGO-S]  94.36,14.61 0 bottom
U$4  OSHW-LOGOS  [OSHW-LOGO-S]  118.75,14.61 0 bottom
U$5  OSHW-LOGOS  [OSHW-LOGO-S]  21.21,40.51 0 bottom
U$6  OSHW-LOGOS  [OSHW-LOGO-S]  45.59,40.51 0 bottom
U$7  OSHW-LOGOS  [OSHW-LOGO-S]  69.98,40.51 0 bottom
U$8  OSHW-LOGOS  [OSHW-LOGO-S]  21.21,14.61 0 bottom
U$9  OSHW-LOGOS  [OSHW-LOGO-S]  94.36,40.51 0 bottom
U$10  OSHW-LOGOS  [OSHW-LOGO-S]  118.75,40.51 0 bottom
U$11  OSHW-LOGOS  [OSHW-LOGO-S]  21.21,66.42 0 bottom
U$12  OSHW-LOGOS  [OSHW-LOGO-S]  45.59,66.42 0 bottom
U$13  OSHW-LOGOS  [OSHW-LOGO-S]  69.98,66.42 0 bottom
U$14  OSHW-LOGOS  [OSHW-LOGO-S]  94.36,66.42 0 bottom
U$15  OSHW-LOGOS  [OSHW-LOGO-S]  118.75,66.42 0 bottom
U$16  OSHW-LOGOS  [OSHW-LOGO-S]  21.21,92.33 0 bottom
U$17  OSHW-LOGOS  [OSHW-LOGO-S]  45.59,92.33 0 bottom
U$18  OSHW-LOGOS  [OSHW-LOGO-S]  69.98,92.33 0 bottom
U$19  OSHW-LOGOS  [OSHW-LOGO-S]  94.36,92.33 0 bottom
U$20  OSHW-LOGOS  [OSHW-LOGO-S]  118.75,92.33 0 bottom
U$21  OSHW-LOGOS  [OSHW-LOGO-S]  21.21,118.24 0 bottom
U$22  OSHW-LOGOS  [OSHW-LOGO-S]  45.59,118.24 0 bottom
U$23  OSHW-LOGOS  [OSHW-LOGO-S]  69.98,118.24 0 bottom
U$24  OSHW-LOGOS  [OSHW-LOGO-S]  94.36,118.24 0 bottom
U$25  OSHW-LOGOS  [OSHW-LOGO-S]  118.75,118.24 0 bottom

## Library data of the parts
C1 C5 C9 C13 C17 C21 C25 C29 C33 C37 C41 C45 C49 C53 C57 C61 C65 C69 C73 C77 C81 C85 C89 C93 C97 = SparkFun; PROD_ID: CAP-00811
C2-C4 C6-C8 C10-C12 C14-C16 C18-C20 C22-C24 C26-C28 C30-C32 C34-C36 C38-C40 C42-C44 C46-C48 C50-C52 C54-C56 C58-C60 C62-C64 C66-C68 C70-C72 C74-C76 C78-C80 C82-C84 C86-C88 C90-C92 C94-C96 C98-C100 = SparkFun-Capacitors; PROD_ID: CAP-00810
E$1 = SparkFun-Retired
E$4 E$5 LOGO1-LOGO50 = SparkFun-Aesthetics
FID1-FID50 U$1-U$25 = SparkFun
JP1 JP4 JP6 JP8 JP10 JP12 JP14 JP16 JP18 JP20 JP22 JP24 JP26 JP28 JP30 JP32 JP34 JP36 JP38 JP40 JP42 JP44 JP46 JP48 JP50 = SparkFun-Connectors
JP2 JP3 JP5 JP7 JP9 JP11 JP13 JP15 JP17 JP19 JP21 JP23 JP25 JP27 JP29 JP31 JP33 JP35 JP37 JP39 JP41 JP43 JP45 JP47 JP49 = SparkFun-Connectors; PROD_ID: CONN-08437
R1 R8 R13 R18 R23 R28 R33 R38 R43 R48 R53 R58 R63 R68 R73 R78 R83 R88 R93 R98 R103 R108 R113 R118 R123 = SparkFun-Passives; PROD_ID: RES-07860
R2 R5-R7 R11 R12 R16 R17 R21 R22 R26 R27 R31 R32 R36 R37 R41 R42 R46 R47 R51 R52 R56 R57 R61 R62 R66 R67 R71 R72 R76 R77 R81 R82 R86 R87 R91 R92 R96 R97 R101 R102 R106 R107 R111 R112 R116 R117 R121 R122 = SparkFun-Resistors; PROD_ID: RES-07857
R3 R4 R9 R10 R14 R15 R19 R20 R24 R25 R29 R30 R34 R35 R39 R40 R44 R45 R49 R50 R54 R55 R59 R60 R64 R65 R69 R70 R74 R75 R79 R80 R84 R85 R89 R90 R94 R95 R99 R100 R104 R105 R109 R110 R114 R115 R119 R120 R124 R125 = SparkFun-Resistors; PROD_ID: RES-00824
SJ1-SJ50 TP1-TP25 = SparkFun-Passives
STANDOFF1-STANDOFF50 = SparkFun-Electromechanical
U1 U3 U5 U7 U9 U11 U13 U15 U17 U19 U21 U23 U25 U27 U29 U31 U33 U35 U37 U39 U41 U43 U45 U47 U49 = SparkFun-DigitalIC; PROD_ID: IC-12557
U2 U4 U6 U8 U10 U12 U14 U16 U18 U20 U22 U24 U26 U28 U30 U32 U34 U36 U38 U40 U42 U44 U46 U48 U50 = SparkFun-DigitalIC; PROD_ID: IC-12558

## Nets
!CS_MAG: JP2.5 R4.2 U1.3
!CS_MAG1: JP3.5 R10.2 U3.3
!CS_MAG2: JP5.5 R15.2 U5.3
!CS_MAG3: JP7.5 R20.2 U7.3
!CS_MAG4: JP9.5 R25.2 U9.3
!CS_MAG5: JP11.5 R30.2 U11.3
!CS_MAG6: JP13.5 R35.2 U13.3
!CS_MAG7: JP15.5 R40.2 U15.3
!CS_MAG8: JP17.5 R45.2 U17.3
!CS_MAG9: JP19.5 R50.2 U19.3
!CS_MAG10: JP21.5 R55.2 U21.3
!CS_MAG11: JP23.5 R60.2 U23.3
!CS_MAG12: JP25.5 R65.2 U25.3
!CS_MAG13: JP27.5 R70.2 U27.3
!CS_MAG14: JP29.5 R75.2 U29.3
!CS_MAG15: JP31.5 R80.2 U31.3
!CS_MAG16: JP33.5 R85.2 U33.3
!CS_MAG17: JP35.5 R90.2 U35.3
!CS_MAG18: JP37.5 R95.2 U37.3
!CS_MAG19: JP39.5 R100.2 U39.3
!CS_MAG20: JP41.5 R105.2 U41.3
!CS_MAG21: JP43.5 R110.2 U43.3
!CS_MAG22: JP45.5 R115.2 U45.3
!CS_MAG23: JP47.5 R120.2 U47.3
!CS_MAG24: JP49.5 R125.2 U49.3
!CS_XL: JP2.3 R3.2 U1.2
!CS_XL1: JP3.3 R9.2 U3.2
!CS_XL2: JP5.3 R14.2 U5.2
!CS_XL3: JP7.3 R19.2 U7.2
!CS_XL4: JP9.3 R24.2 U9.2
!CS_XL5: JP11.3 R29.2 U11.2
!CS_XL6: JP13.3 R34.2 U13.2
!CS_XL7: JP15.3 R39.2 U15.2
!CS_XL8: JP17.3 R44.2 U17.2
!CS_XL9: JP19.3 R49.2 U19.2
!CS_XL10: JP21.3 R54.2 U21.2
!CS_XL11: JP23.3 R59.2 U23.2
!CS_XL12: JP25.3 R64.2 U25.2
!CS_XL13: JP27.3 R69.2 U27.2
!CS_XL14: JP29.3 R74.2 U29.2
!CS_XL15: JP31.3 R79.2 U31.2
!CS_XL16: JP33.3 R84.2 U33.2
!CS_XL17: JP35.3 R89.2 U35.2
!CS_XL18: JP37.3 R94.2 U37.2
!CS_XL19: JP39.3 R99.2 U39.2
!CS_XL20: JP41.3 R104.2 U41.2
!CS_XL21: JP43.3 R109.2 U43.2
!CS_XL22: JP45.3 R114.2 U45.2
!CS_XL23: JP47.3 R119.2 U47.2
!CS_XL24: JP49.3 R124.2 U49.2
DRDY_MAG: JP2.2 U1.11
DRDY_MAG1: JP3.2 U3.11
DRDY_MAG2: JP5.2 U5.11
DRDY_MAG3: JP7.2 U7.11
DRDY_MAG4: JP9.2 U9.11
DRDY_MAG5: JP11.2 U11.11
DRDY_MAG6: JP13.2 U13.11
DRDY_MAG7: JP15.2 U15.11
DRDY_MAG8: JP17.2 U17.11
DRDY_MAG9: JP19.2 U19.11
DRDY_MAG10: JP21.2 U21.11
DRDY_MAG11: JP23.2 U23.11
DRDY_MAG12: JP25.2 U25.11
DRDY_MAG13: JP27.2 U27.11
DRDY_MAG14: JP29.2 U29.11
DRDY_MAG15: JP31.2 U31.11
DRDY_MAG16: JP33.2 U33.11
DRDY_MAG17: JP35.2 U35.11
DRDY_MAG18: JP37.2 U37.11
DRDY_MAG19: JP39.2 U39.11
DRDY_MAG20: JP41.2 U41.11
DRDY_MAG21: JP43.2 U43.11
DRDY_MAG22: JP45.2 U45.11
DRDY_MAG23: JP47.2 U47.11
DRDY_MAG24: JP49.2 U49.11
GND: C1.C C2.2 C3.2 C4.1 JP1.1 U1.6 U1.8 U2.2
GND1: C5.C C6.2 C7.1 C8.2 JP4.1 U3.6 U3.8 U4.2
GND2: C9.C C10.2 C11.1 C12.2 JP6.1 U5.6 U5.8 U6.2
GND3: C13.C C14.2 C15.1 C16.2 JP8.1 U7.6 U7.8 U8.2
GND4: C17.C C18.2 C19.1 C20.2 JP10.1 U9.6 U9.8 U10.2
GND5: C21.C C22.2 C23.1 C24.2 JP12.1 U11.6 U11.8 U12.2
GND6: C25.C C26.2 C27.1 C28.2 JP14.1 U13.6 U13.8 U14.2
GND7: C29.C C30.2 C31.1 C32.2 JP16.1 U15.6 U15.8 U16.2
GND8: C33.C C34.2 C35.1 C36.2 JP18.1 U17.6 U17.8 U18.2
GND9: C37.C C38.2 C39.1 C40.2 JP20.1 U19.6 U19.8 U20.2
GND10: C41.C C42.2 C43.1 C44.2 JP22.1 U21.6 U21.8 U22.2
GND11: C45.C C46.2 C47.1 C48.2 JP24.1 U23.6 U23.8 U24.2
GND12: C49.C C50.2 C51.1 C52.2 JP26.1 U25.6 U25.8 U26.2
GND13: C53.C C54.2 C55.1 C56.2 JP28.1 U27.6 U27.8 U28.2
GND14: C57.C C58.2 C59.1 C60.2 JP30.1 U29.6 U29.8 U30.2
GND15: C61.C C62.2 C63.1 C64.2 JP32.1 U31.6 U31.8 U32.2
GND16: C65.C C66.2 C67.1 C68.2 JP34.1 U33.6 U33.8 U34.2
GND17: C69.C C70.2 C71.1 C72.2 JP36.1 U35.6 U35.8 U36.2
GND18: C73.C C74.2 C75.1 C76.2 JP38.1 U37.6 U37.8 U38.2
GND19: C77.C C78.2 C79.1 C80.2 JP40.1 U39.6 U39.8 U40.2
GND20: C81.C C82.2 C83.1 C84.2 JP42.1 U41.6 U41.8 U42.2
GND21: C85.C C86.2 C87.1 C88.2 JP44.1 U43.6 U43.8 U44.2
GND22: C89.C C90.2 C91.1 C92.2 JP46.1 U45.6 U45.8 U46.2
GND23: C93.C C94.2 C95.1 C96.2 JP48.1 U47.6 U47.8 U48.2
GND24: C97.C C98.2 C99.1 C100.2 JP50.1 U49.6 U49.8 U50.2
I2C-UP: R5.2 SJ1.1
I2C-UP1: R7.2 SJ3.1
I2C-UP2: R12.2 SJ5.1
I2C-UP3: R17.2 SJ7.1
I2C-UP4: R22.2 SJ9.1
I2C-UP5: R27.2 SJ11.1
I2C-UP6: R32.2 SJ13.1
I2C-UP7: R37.2 SJ15.1
I2C-UP8: R42.2 SJ17.1
I2C-UP9: R47.2 SJ19.1
I2C-UP10: R52.2 SJ21.1
I2C-UP11: R57.2 SJ23.1
I2C-UP12: R62.2 SJ25.1
I2C-UP13: R67.2 SJ27.1
I2C-UP14: R72.2 SJ29.1
I2C-UP15: R77.2 SJ31.1
I2C-UP16: R82.2 SJ33.1
I2C-UP17: R87.2 SJ35.1
I2C-UP18: R92.2 SJ37.1
I2C-UP19: R97.2 SJ39.1
I2C-UP20: R102.2 SJ41.1
I2C-UP21: R107.2 SJ43.1
I2C-UP22: R112.2 SJ45.1
I2C-UP23: R117.2 SJ47.1
I2C-UP24: R122.2 SJ49.1
INT_MAG: JP2.6 U1.7
INT_MAG1: JP3.6 U3.7
INT_MAG2: JP5.6 U5.7
INT_MAG3: JP7.6 U7.7
INT_MAG4: JP9.6 U9.7
INT_MAG5: JP11.6 U11.7
INT_MAG6: JP13.6 U13.7
INT_MAG7: JP15.6 U15.7
INT_MAG8: JP17.6 U17.7
INT_MAG9: JP19.6 U19.7
INT_MAG10: JP21.6 U21.7
INT_MAG11: JP23.6 U23.7
INT_MAG12: JP25.6 U25.7
INT_MAG13: JP27.6 U27.7
INT_MAG14: JP29.6 U29.7
INT_MAG15: JP31.6 U31.7
INT_MAG16: JP33.6 U33.7
INT_MAG17: JP35.6 U35.7
INT_MAG18: JP37.6 U37.7
INT_MAG19: JP39.6 U39.7
INT_MAG20: JP41.6 U41.7
INT_MAG21: JP43.6 U43.7
INT_MAG22: JP45.6 U45.7
INT_MAG23: JP47.6 U47.7
INT_MAG24: JP49.6 U49.7
INT_XL: JP2.1 U1.12
INT_XL1: JP3.1 U3.12
INT_XL2: JP5.1 U5.12
INT_XL3: JP7.1 U7.12
INT_XL4: JP9.1 U9.12
INT_XL5: JP11.1 U11.12
INT_XL6: JP13.1 U13.12
INT_XL7: JP15.1 U15.12
INT_XL8: JP17.1 U17.12
INT_XL9: JP19.1 U19.12
INT_XL10: JP21.1 U21.12
INT_XL11: JP23.1 U23.12
INT_XL12: JP25.1 U25.12
INT_XL13: JP27.1 U27.12
INT_XL14: JP29.1 U29.12
INT_XL15: JP31.1 U31.12
INT_XL16: JP33.1 U33.12
INT_XL17: JP35.1 U35.12
INT_XL18: JP37.1 U37.12
INT_XL19: JP39.1 U39.12
INT_XL20: JP41.1 U41.12
INT_XL21: JP43.1 U43.12
INT_XL22: JP45.1 U45.12
INT_XL23: JP47.1 U47.12
INT_XL24: JP49.1 U49.12
N$1: C4.2 U1.5
N$2: R2.2 SJ1.3
N$3: C7.2 U3.5
N$4: R6.2 SJ3.3
N$5: C11.2 U5.5
N$6: R11.2 SJ5.3
N$7: C15.2 U7.5
N$8: R16.2 SJ7.3
N$9: C19.2 U9.5
N$10: R21.2 SJ9.3
N$11: C23.2 U11.5
N$12: R26.2 SJ11.3
N$13: C27.2 U13.5
N$14: R31.2 SJ13.3
N$15: C31.2 U15.5
N$16: R36.2 SJ15.3
N$17: C35.2 U17.5
N$18: R41.2 SJ17.3
N$19: C39.2 U19.5
N$20: R46.2 SJ19.3
N$21: C43.2 U21.5
N$22: R51.2 SJ21.3
N$23: C47.2 U23.5
N$24: R56.2 SJ23.3
N$25: C51.2 U25.5
N$26: R61.2 SJ25.3
N$27: C55.2 U27.5
N$28: R66.2 SJ27.3
N$29: C59.2 U29.5
N$30: R71.2 SJ29.3
N$31: C63.2 U31.5
N$32: R76.2 SJ31.3
N$33: C67.2 U33.5
N$34: R81.2 SJ33.3
N$35: C71.2 U35.5
N$36: R86.2 SJ35.3
N$37: C75.2 U37.5
N$38: R91.2 SJ37.3
N$39: C79.2 U39.5
N$40: R96.2 SJ39.3
N$41: C83.2 U41.5
N$42: R101.2 SJ41.3
N$43: C87.2 U43.5
N$44: R106.2 SJ43.3
N$45: C91.2 U45.5
N$46: R111.2 SJ45.3
N$47: C95.2 U47.5
N$48: R116.2 SJ47.3
N$49: C99.2 U49.5
N$50: R121.2 SJ49.3
SCL/SCLK: JP1.4 R2.1 U1.1
SCL/SCLK1: JP4.4 R6.1 U3.1
SCL/SCLK2: JP6.4 R11.1 U5.1
SCL/SCLK3: JP8.4 R16.1 U7.1
SCL/SCLK4: JP10.4 R21.1 U9.1
SCL/SCLK5: JP12.4 R26.1 U11.1
SCL/SCLK6: JP14.4 R31.1 U13.1
SCL/SCLK7: JP16.4 R36.1 U15.1
SCL/SCLK8: JP18.4 R41.1 U17.1
SCL/SCLK9: JP20.4 R46.1 U19.1
SCL/SCLK10: JP22.4 R51.1 U21.1
SCL/SCLK11: JP24.4 R56.1 U23.1
SCL/SCLK12: JP26.4 R61.1 U25.1
SCL/SCLK13: JP28.4 R66.1 U27.1
SCL/SCLK14: JP30.4 R71.1 U29.1
SCL/SCLK15: JP32.4 R76.1 U31.1
SCL/SCLK16: JP34.4 R81.1 U33.1
SCL/SCLK17: JP36.4 R86.1 U35.1
SCL/SCLK18: JP38.4 R91.1 U37.1
SCL/SCLK19: JP40.4 R96.1 U39.1
SCL/SCLK20: JP42.4 R101.1 U41.1
SCL/SCLK21: JP44.4 R106.1 U43.1
SCL/SCLK22: JP46.4 R111.1 U45.1
SCL/SCLK23: JP48.4 R116.1 U47.1
SCL/SCLK24: JP50.4 R121.1 U49.1
SDA/SDI/SDO: JP1.3 R5.1 U1.4
SDA/SDI/SDO1: JP4.3 R7.1 U3.4
SDA/SDI/SDO2: JP6.3 R12.1 U5.4
SDA/SDI/SDO3: JP8.3 R17.1 U7.4
SDA/SDI/SDO4: JP10.3 R22.1 U9.4
SDA/SDI/SDO5: JP12.3 R27.1 U11.4
SDA/SDI/SDO6: JP14.3 R32.1 U13.4
SDA/SDI/SDO7: JP16.3 R37.1 U15.4
SDA/SDI/SDO8: JP18.3 R42.1 U17.4
SDA/SDI/SDO9: JP20.3 R47.1 U19.4
SDA/SDI/SDO10: JP22.3 R52.1 U21.4
SDA/SDI/SDO11: JP24.3 R57.1 U23.4
SDA/SDI/SDO12: JP26.3 R62.1 U25.4
SDA/SDI/SDO13: JP28.3 R67.1 U27.4
SDA/SDI/SDO14: JP30.3 R72.1 U29.4
SDA/SDI/SDO15: JP32.3 R77.1 U31.4
SDA/SDI/SDO16: JP34.3 R82.1 U33.4
SDA/SDI/SDO17: JP36.3 R87.1 U35.4
SDA/SDI/SDO18: JP38.3 R92.1 U37.4
SDA/SDI/SDO19: JP40.3 R97.1 U39.4
SDA/SDI/SDO20: JP42.3 R102.1 U41.4
SDA/SDI/SDO21: JP44.3 R107.1 U43.4
SDA/SDI/SDO22: JP46.3 R112.1 U45.4
SDA/SDI/SDO23: JP48.3 R117.1 U47.4
SDA/SDI/SDO24: JP50.3 R122.1 U49.4
VCC: JP2.4 R1.1 SJ2.2 U2.1 U2.3
VCC1: JP3.4 R8.1 SJ4.2 U4.1 U4.3
VCC2: JP5.4 R13.1 SJ6.2 U6.1 U6.3
VCC3: JP7.4 R18.1 SJ8.2 U8.1 U8.3
VCC4: JP9.4 R23.1 SJ10.2 U10.1 U10.3
VCC5: JP11.4 R28.1 SJ12.2 U12.1 U12.3
VCC6: JP13.4 R33.1 SJ14.2 U14.1 U14.3
VCC7: JP15.4 R38.1 SJ16.2 U16.1 U16.3
VCC8: JP17.4 R43.1 SJ18.2 U18.1 U18.3
VCC9: JP19.4 R48.1 SJ20.2 U20.1 U20.3
VCC10: JP21.4 R53.1 SJ22.2 U22.1 U22.3
VCC11: JP23.4 R58.1 SJ24.2 U24.1 U24.3
VCC12: JP25.4 R63.1 SJ26.2 U26.1 U26.3
VCC13: JP27.4 R68.1 SJ28.2 U28.1 U28.3
VCC14: JP29.4 R73.1 SJ30.2 U30.1 U30.3
VCC15: JP31.4 R78.1 SJ32.2 U32.1 U32.3
VCC16: JP33.4 R83.1 SJ34.2 U34.1 U34.3
VCC17: JP35.4 R88.1 SJ36.2 U36.1 U36.3
VCC18: JP37.4 R93.1 SJ38.2 U38.1 U38.3
VCC19: JP39.4 R98.1 SJ40.2 U40.1 U40.3
VCC20: JP41.4 R103.1 SJ42.2 U42.1 U42.3
VCC21: JP43.4 R108.1 SJ44.2 U44.1 U44.3
VCC22: JP45.4 R113.1 SJ46.2 U46.1 U46.3
VCC23: JP47.4 R118.1 SJ48.2 U48.1 U48.3
VCC24: JP49.4 R123.1 SJ50.2 U50.1 U50.3
VDD: C1.A C2.1 R1.2 TP1.P$1 U1.9 U2.6
VDD1: C5.A C6.1 R8.2 TP2.P$1 U3.9 U4.6
VDD2: C9.A C10.1 R13.2 TP3.P$1 U5.9 U6.6
VDD3: C13.A C14.1 R18.2 TP4.P$1 U7.9 U8.6
VDD4: C17.A C18.1 R23.2 TP5.P$1 U9.9 U10.6
VDD5: C21.A C22.1 R28.2 TP6.P$1 U11.9 U12.6
VDD6: C25.A C26.1 R33.2 TP7.P$1 U13.9 U14.6
VDD7: C29.A C30.1 R38.2 TP8.P$1 U15.9 U16.6
VDD8: C33.A C34.1 R43.2 TP9.P$1 U17.9 U18.6
VDD9: C37.A C38.1 R48.2 TP10.P$1 U19.9 U20.6
VDD10: C41.A C42.1 R53.2 TP11.P$1 U21.9 U22.6
VDD11: C45.A C46.1 R58.2 TP12.P$1 U23.9 U24.6
VDD12: C49.A C50.1 R63.2 TP13.P$1 U25.9 U26.6
VDD13: C53.A C54.1 R68.2 TP14.P$1 U27.9 U28.6
VDD14: C57.A C58.1 R73.2 TP15.P$1 U29.9 U30.6
VDD15: C61.A C62.1 R78.2 TP16.P$1 U31.9 U32.6
VDD16: C65.A C66.1 R83.2 TP17.P$1 U33.9 U34.6
VDD17: C69.A C70.1 R88.2 TP18.P$1 U35.9 U36.6
VDD18: C73.A C74.1 R93.2 TP19.P$1 U37.9 U38.6
VDD19: C77.A C78.1 R98.2 TP20.P$1 U39.9 U40.6
VDD20: C81.A C82.1 R103.2 TP21.P$1 U41.9 U42.6
VDD21: C85.A C86.1 R108.2 TP22.P$1 U43.9 U44.6
VDD22: C89.A C90.1 R113.2 TP23.P$1 U45.9 U46.6
VDD23: C93.A C94.1 R118.2 TP24.P$1 U47.9 U48.6
VDD24: C97.A C98.1 R123.2 TP25.P$1 U49.9 U50.6
VDD_IO: C3.1 JP1.2 R3.1 R4.1 SJ1.2 SJ2.1 U1.10
VDD_IO1: C8.1 JP4.2 R9.1 R10.1 SJ3.2 SJ4.1 U3.10
VDD_IO2: C12.1 JP6.2 R14.1 R15.1 SJ5.2 SJ6.1 U5.10
VDD_IO3: C16.1 JP8.2 R19.1 R20.1 SJ7.2 SJ8.1 U7.10
VDD_IO4: C20.1 JP10.2 R24.1 R25.1 SJ9.2 SJ10.1 U9.10
VDD_IO5: C24.1 JP12.2 R29.1 R30.1 SJ11.2 SJ12.1 U11.10
VDD_IO6: C28.1 JP14.2 R34.1 R35.1 SJ13.2 SJ14.1 U13.10
VDD_IO7: C32.1 JP16.2 R39.1 R40.1 SJ15.2 SJ16.1 U15.10
VDD_IO8: C36.1 JP18.2 R44.1 R45.1 SJ17.2 SJ18.1 U17.10
VDD_IO9: C40.1 JP20.2 R49.1 R50.1 SJ19.2 SJ20.1 U19.10
VDD_IO10: C44.1 JP22.2 R54.1 R55.1 SJ21.2 SJ22.1 U21.10
VDD_IO11: C48.1 JP24.2 R59.1 R60.1 SJ23.2 SJ24.1 U23.10
VDD_IO12: C52.1 JP26.2 R64.1 R65.1 SJ25.2 SJ26.1 U25.10
VDD_IO13: C56.1 JP28.2 R69.1 R70.1 SJ27.2 SJ28.1 U27.10
VDD_IO14: C60.1 JP30.2 R74.1 R75.1 SJ29.2 SJ30.1 U29.10
VDD_IO15: C64.1 JP32.2 R79.1 R80.1 SJ31.2 SJ32.1 U31.10
VDD_IO16: C68.1 JP34.2 R84.1 R85.1 SJ33.2 SJ34.1 U33.10
VDD_IO17: C72.1 JP36.2 R89.1 R90.1 SJ35.2 SJ36.1 U35.10
VDD_IO18: C76.1 JP38.2 R94.1 R95.1 SJ37.2 SJ38.1 U37.10
VDD_IO19: C80.1 JP40.2 R99.1 R100.1 SJ39.2 SJ40.1 U39.10
VDD_IO20: C84.1 JP42.2 R104.1 R105.1 SJ41.2 SJ42.1 U41.10
VDD_IO21: C88.1 JP44.2 R109.1 R110.1 SJ43.2 SJ44.1 U43.10
VDD_IO22: C92.1 JP46.2 R114.1 R115.1 SJ45.2 SJ46.1 U45.10
VDD_IO23: C96.1 JP48.2 R119.1 R120.1 SJ47.2 SJ48.1 U47.10
VDD_IO24: C100.1 JP50.2 R124.1 R125.1 SJ49.2 SJ50.1 U49.10

## Tracks (layer width: path | path; a pad name or v marks a point on that pad's centre or on a via)
!CS_MAG  (via drill 0.51)
  Top 0.254: U1.3 14.33,15.75 arc45 14.15,15.68 v13.46,14.99 10.83,14.99 arc90 10.16,14.31 10.16,13.46 arc-90 9.82,13.12 R4.2
  Bottom 0.254: v13.46,14.99 13.72,15.24 14.53,15.24 17.83,11.94 19.05,11.94 20.32,10.67 JP2.5
!CS_MAG1  (via drill 0.51)
  Top 0.254: U3.3 38.72,15.75 arc45 38.54,15.68 v37.85,14.99 35.22,14.99 arc90 34.54,14.31 34.54,13.46 arc-90 34.2,13.12 R10.2
  Bottom 0.254: v37.85,14.99 38.1,15.24 38.91,15.24 42.22,11.94 43.43,11.94 44.7,10.67 JP3.5
!CS_MAG2  (via drill 0.51)
  Top 0.254: U5.3 63.1,15.75 arc45 62.92,15.68 v62.23,14.99 59.6,14.99 arc90 58.93,14.31 58.93,13.46 arc-90 58.59,13.12 R15.2
  Bottom 0.254: v62.23,14.99 62.48,15.24 63.3,15.24 66.6,11.94 67.82,11.94 69.09,10.67 JP5.5
!CS_MAG3  (via drill 0.51)
  Top 0.254: U7.3 87.48,15.75 arc45 87.31,15.68 v86.61,14.99 83.99,14.99 arc90 83.31,14.31 83.31,13.46 arc-90 82.97,13.12 R20.2
  Bottom 0.254: v86.61,14.99 86.87,15.24 87.68,15.24 90.98,11.94 92.2,11.94 93.47,10.67 JP7.5
!CS_MAG4  (via drill 0.51)
  Top 0.254: U9.3 111.87,15.75 arc45 111.69,15.68 v111,14.99 108.37,14.99 arc90 107.7,14.31 107.7,13.46 arc-90 107.35,13.12 R25.2
  Bottom 0.254: v111,14.99 111.25,15.24 112.06,15.24 115.37,11.94 116.59,11.94 117.86,10.67 JP9.5
!CS_MAG5  (via drill 0.51)
  Top 0.254: U11.3 14.33,41.66 arc45 14.15,41.59 v13.46,40.89 10.83,40.89 arc90 10.16,40.22 10.16,39.37 arc-90 9.82,39.03 R30.2
  Bottom 0.254: v13.46,40.89 13.72,41.15 14.53,41.15 17.83,37.85 19.05,37.85 20.32,36.58 JP11.5
!CS_MAG6  (via drill 0.51)
  Top 0.254: U13.3 38.72,41.66 arc45 38.54,41.59 v37.85,40.89 35.22,40.89 arc90 34.54,40.22 34.54,39.37 arc-90 34.2,39.03 R35.2
  Bottom 0.254: v37.85,40.89 38.1,41.15 38.91,41.15 42.22,37.85 43.43,37.85 44.7,36.58 JP13.5
!CS_MAG7  (via drill 0.51)
  Top 0.254: U15.3 63.1,41.66 arc45 62.92,41.59 v62.23,40.89 59.6,40.89 arc90 58.93,40.22 58.93,39.37 arc-90 58.59,39.03 R40.2
  Bottom 0.254: v62.23,40.89 62.48,41.15 63.3,41.15 66.6,37.85 67.82,37.85 69.09,36.58 JP15.5
!CS_MAG8  (via drill 0.51)
  Top 0.254: U17.3 87.48,41.66 arc45 87.31,41.59 v86.61,40.89 83.99,40.89 arc90 83.31,40.22 83.31,39.37 arc-90 82.97,39.03 R45.2
  Bottom 0.254: v86.61,40.89 86.87,41.15 87.68,41.15 90.98,37.85 92.2,37.85 93.47,36.58 JP17.5
!CS_MAG9  (via drill 0.51)
  Top 0.254: U19.3 111.87,41.66 arc45 111.69,41.59 v111,40.89 108.37,40.89 arc90 107.7,40.22 107.7,39.37 arc-90 107.35,39.03 R50.2
  Bottom 0.254: v111,40.89 111.25,41.15 112.06,41.15 115.37,37.85 116.59,37.85 117.86,36.58 JP19.5
!CS_MAG10  (via drill 0.51)
  Top 0.254: U21.3 14.33,67.57 arc45 14.15,67.49 v13.46,66.8 10.83,66.8 arc90 10.16,66.13 10.16,65.28 arc-90 9.82,64.94 R55.2
  Bottom 0.254: v13.46,66.8 13.72,67.06 14.53,67.06 17.83,63.75 19.05,63.75 20.32,62.48 JP21.5
!CS_MAG11  (via drill 0.51)
  Top 0.254: U23.3 38.72,67.57 arc45 38.54,67.49 v37.85,66.8 35.22,66.8 arc90 34.54,66.13 34.54,65.28 arc-90 34.2,64.94 R60.2
  Bottom 0.254: v37.85,66.8 38.1,67.06 38.91,67.06 42.22,63.75 43.43,63.75 44.7,62.48 JP23.5
!CS_MAG12  (via drill 0.51)
  Top 0.254: U25.3 63.1,67.57 arc45 62.92,67.49 v62.23,66.8 59.6,66.8 arc90 58.93,66.13 58.93,65.28 arc-90 58.59,64.94 R65.2
  Bottom 0.254: v62.23,66.8 62.48,67.06 63.3,67.06 66.6,63.75 67.82,63.75 69.09,62.48 JP25.5
!CS_MAG13  (via drill 0.51)
  Top 0.254: U27.3 87.48,67.57 arc45 87.31,67.49 v86.61,66.8 83.99,66.8 arc90 83.31,66.13 83.31,65.28 arc-90 82.97,64.94 R70.2
  Bottom 0.254: v86.61,66.8 86.87,67.06 87.68,67.06 90.98,63.75 92.2,63.75 93.47,62.48 JP27.5
!CS_MAG14  (via drill 0.51)
  Top 0.254: U29.3 111.87,67.57 arc45 111.69,67.49 v111,66.8 108.37,66.8 arc90 107.7,66.13 107.7,65.28 arc-90 107.35,64.94 R75.2
  Bottom 0.254: v111,66.8 111.25,67.06 112.06,67.06 115.37,63.75 116.59,63.75 117.86,62.48 JP29.5
!CS_MAG15  (via drill 0.51)
  Top 0.254: U31.3 14.33,93.48 arc45 14.15,93.4 v13.46,92.71 10.83,92.71 arc90 10.16,92.04 10.16,91.19 arc-90 9.82,90.84 R80.2
  Bottom 0.254: v13.46,92.71 13.72,92.96 14.53,92.96 17.83,89.66 19.05,89.66 20.32,88.39 JP31.5
!CS_MAG16  (via drill 0.51)
  Top 0.254: U33.3 38.72,93.48 arc45 38.54,93.4 v37.85,92.71 35.22,92.71 arc90 34.54,92.04 34.54,91.19 arc-90 34.2,90.84 R85.2
  Bottom 0.254: v37.85,92.71 38.1,92.96 38.91,92.96 42.22,89.66 43.43,89.66 44.7,88.39 JP33.5
!CS_MAG17  (via drill 0.51)
  Top 0.254: U35.3 63.1,93.48 arc45 62.92,93.4 v62.23,92.71 59.6,92.71 arc90 58.93,92.04 58.93,91.19 arc-90 58.59,90.84 R90.2
  Bottom 0.254: v62.23,92.71 62.48,92.96 63.3,92.96 66.6,89.66 67.82,89.66 69.09,88.39 JP35.5
!CS_MAG18  (via drill 0.51)
  Top 0.254: U37.3 87.48,93.48 arc45 87.31,93.4 v86.61,92.71 83.99,92.71 arc90 83.31,92.04 83.31,91.19 arc-90 82.97,90.84 R95.2
  Bottom 0.254: v86.61,92.71 86.87,92.96 87.68,92.96 90.98,89.66 92.2,89.66 93.47,88.39 JP37.5
!CS_MAG19  (via drill 0.51)
  Top 0.254: U39.3 111.87,93.48 arc45 111.69,93.4 v111,92.71 108.37,92.71 arc90 107.7,92.04 107.7,91.19 arc-90 107.35,90.84 R100.2
  Bottom 0.254: v111,92.71 111.25,92.96 112.06,92.96 115.37,89.66 116.59,89.66 117.86,88.39 JP39.5
!CS_MAG20  (via drill 0.51)
  Top 0.254: U41.3 14.33,119.38 arc45 14.15,119.31 v13.46,118.62 10.83,118.62 arc90 10.16,117.94 10.16,117.09 arc-90 9.82,116.75 R105.2
  Bottom 0.254: v13.46,118.62 13.72,118.87 14.53,118.87 17.83,115.57 19.05,115.57 20.32,114.3 JP41.5
!CS_MAG21  (via drill 0.51)
  Top 0.254: U43.3 38.72,119.38 arc45 38.54,119.31 v37.85,118.62 35.22,118.62 arc90 34.54,117.94 34.54,117.09 arc-90 34.2,116.75 R110.2
  Bottom 0.254: v37.85,118.62 38.1,118.87 38.91,118.87 42.22,115.57 43.43,115.57 44.7,114.3 JP43.5
!CS_MAG22  (via drill 0.51)